# EAGLE board A111_Pulsed_Radar_Breakout-Panel (EAGLE 9.5.2), part 1 of 2
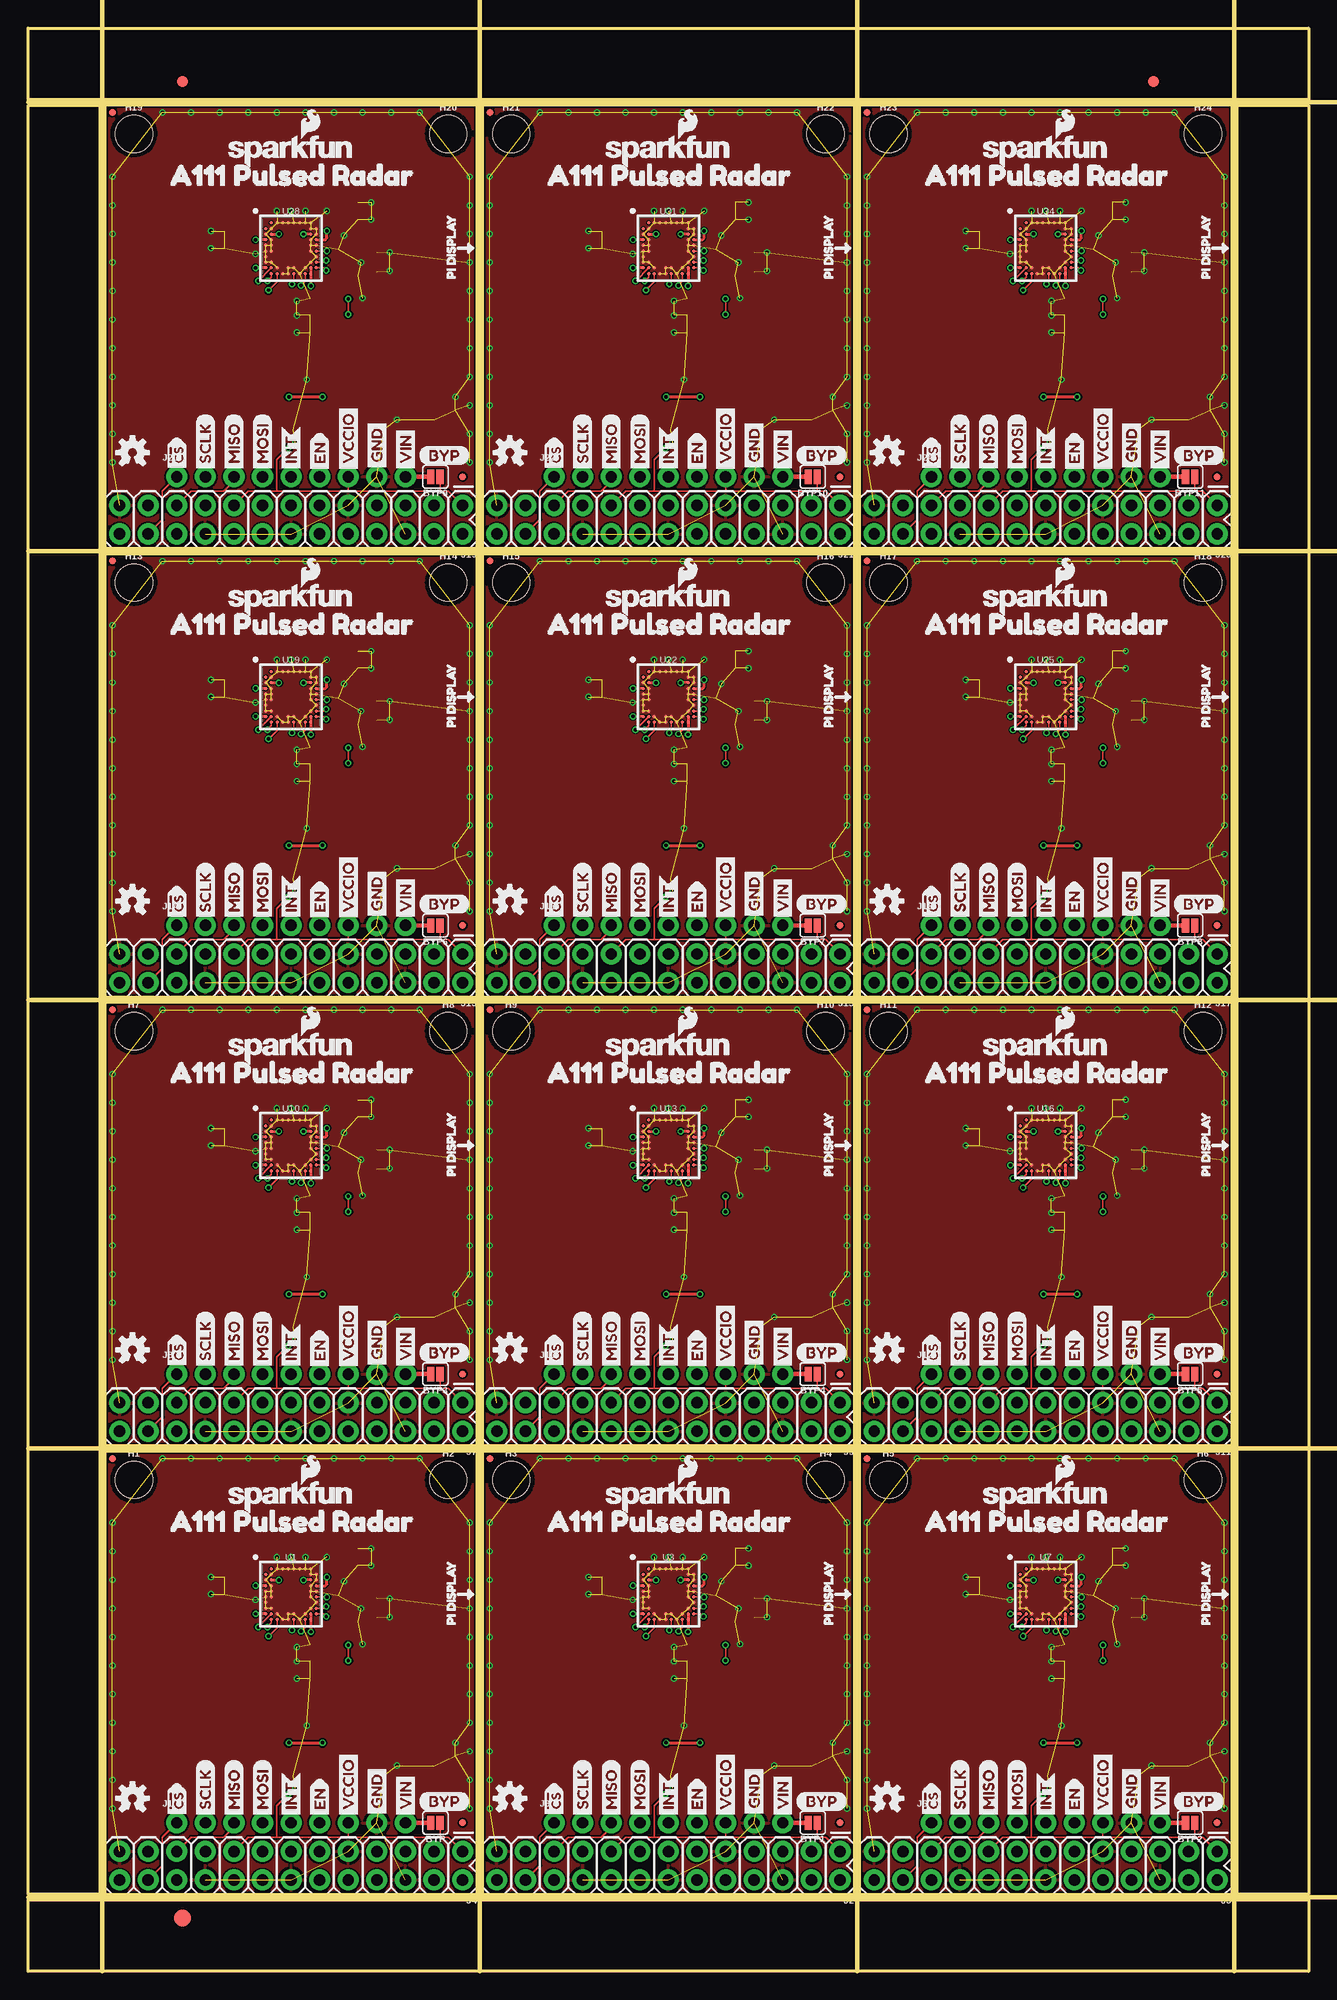
[diagram p0: board, top side]
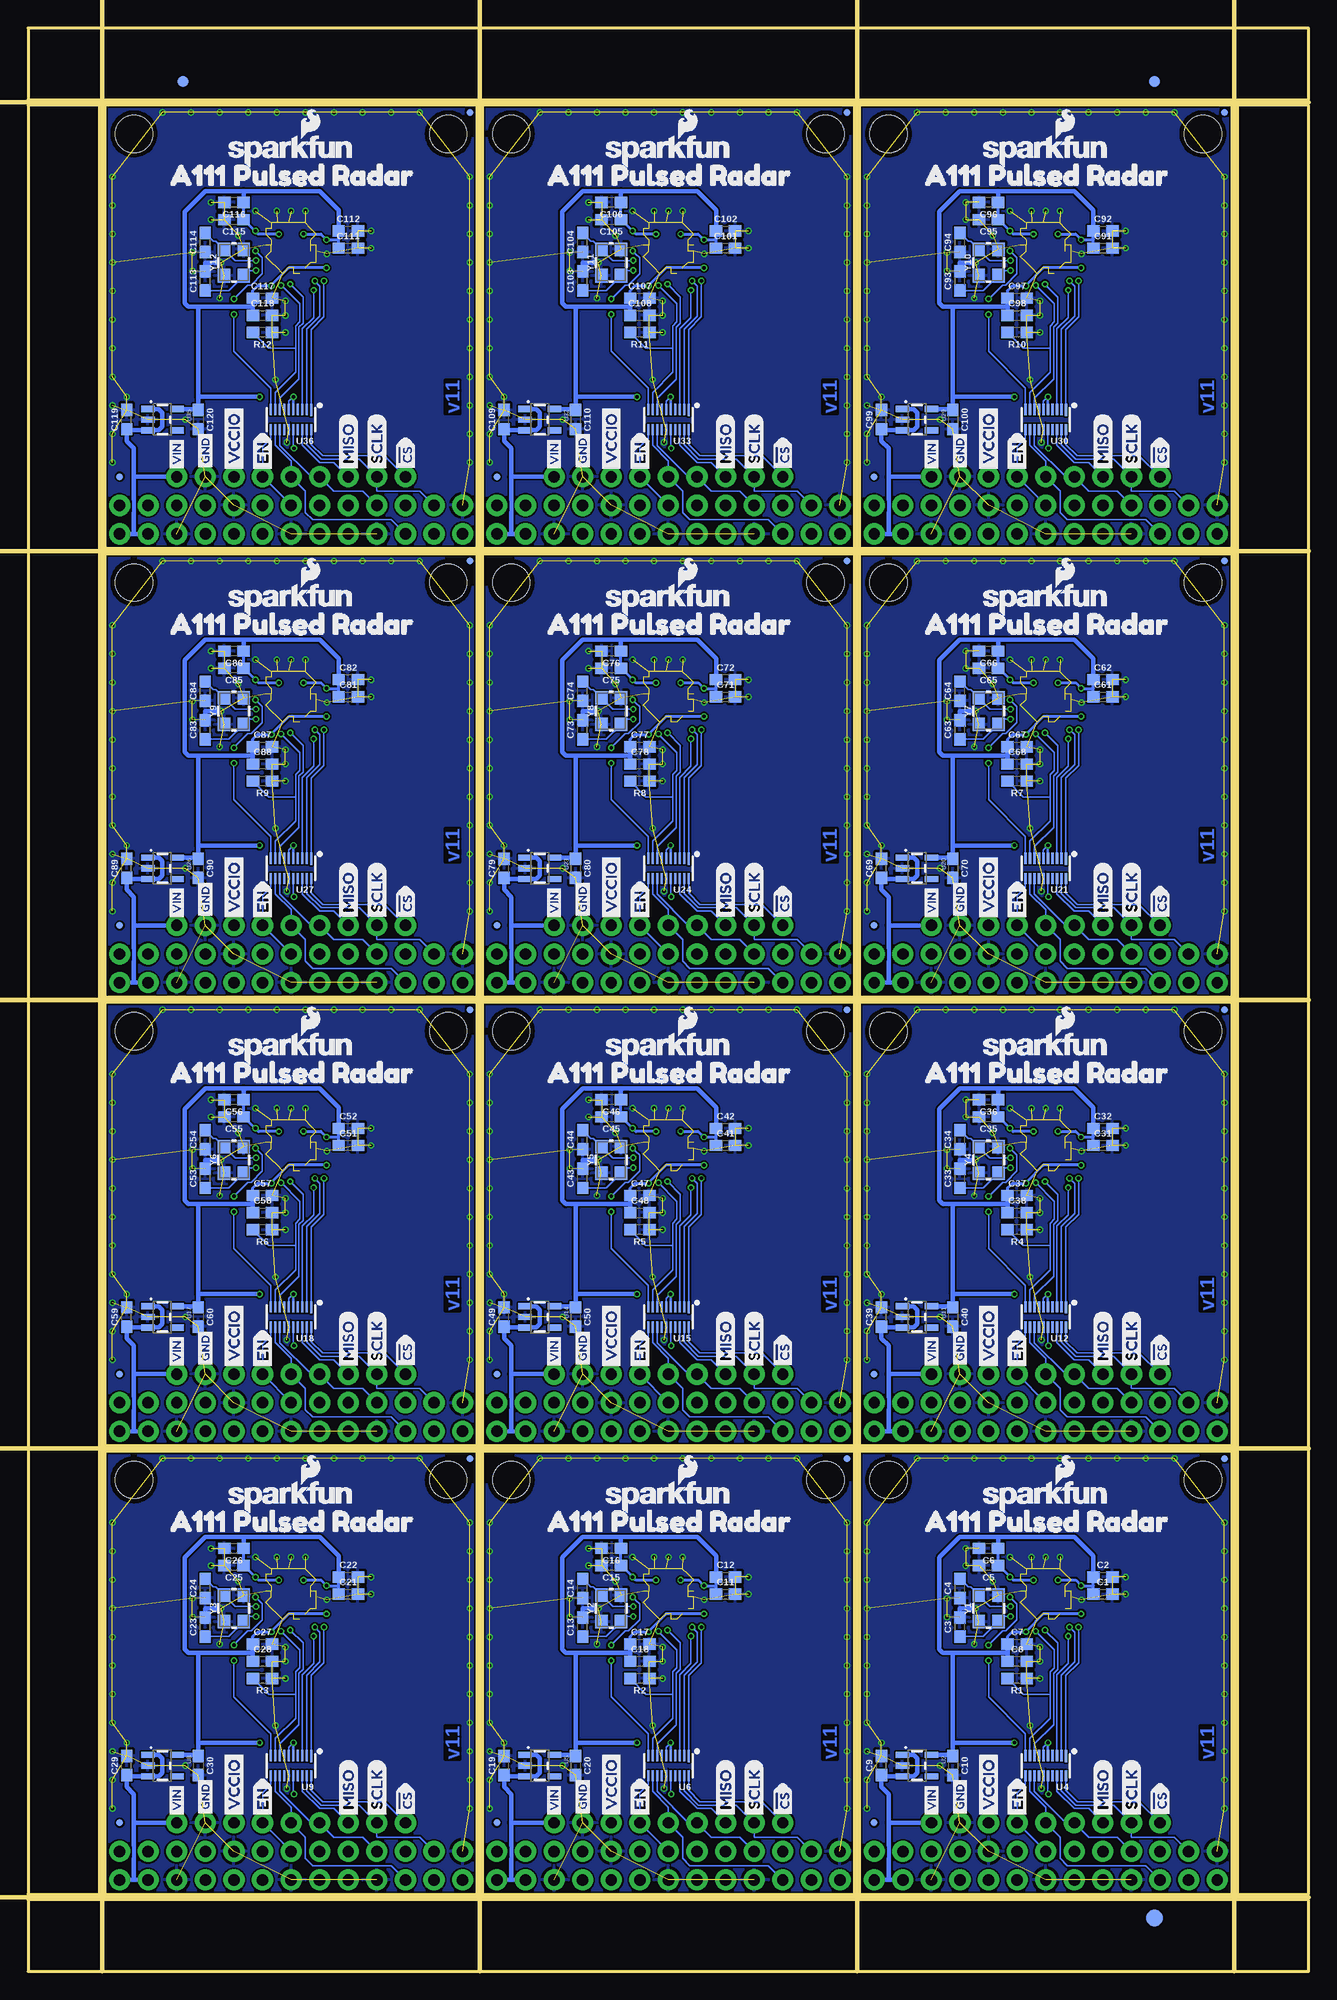
[diagram p1: board, bottom side, seen from below]

Size 113.79 x 172.72 mm. Coordinates in mm from the lower left corner, seen from the top.
Outline: 6.86,6.86 39.88,6.86 39.88,46.23 6.86,46.23 6.86,6.86
Outline: 40.39,6.86 73.41,6.86 73.41,46.23 40.39,46.23 40.39,6.86
Outline: 73.91,6.86 106.93,6.86 106.93,46.23 73.91,46.23 73.91,6.86
Outline: 6.86,46.74 39.88,46.74 39.88,86.11 6.86,86.11 6.86,46.74
Outline: 40.39,46.74 73.41,46.74 73.41,86.11 40.39,86.11 40.39,46.74
Outline: 73.91,46.74 106.93,46.74 106.93,86.11 73.91,86.11 73.91,46.74
Outline: 6.86,86.61 39.88,86.61 39.88,125.98 6.86,125.98 6.86,86.61
Outline: 40.39,86.61 73.41,86.61 73.41,125.98 40.39,125.98 40.39,86.61
Outline: 73.91,86.61 106.93,86.61 106.93,125.98 73.91,125.98 73.91,86.61
Outline: 6.86,126.49 39.88,126.49 39.88,165.86 6.86,165.86 6.86,126.49
Outline: 40.39,126.49 73.41,126.49 73.41,165.86 40.39,165.86 40.39,126.49
Outline: 73.91,126.49 106.93,126.49 106.93,165.86 73.91,165.86 73.91,126.49
Outline: 0,6.35 113.79,6.35 113.79,0 0,0 0,6.35
Outline: 107.44,165.86 113.79,165.86 113.79,6.86 107.44,6.86 107.44,165.86
Outline: 0,172.72 113.79,172.72 113.79,166.37 0,166.37 0,172.72
Outline: 0,165.86 6.35,165.86 6.35,6.86 0,6.86 0,165.86
Copper layers (1*16): Top 0.035mm / dielectric 1.5mm / Bottom 0.035mm
Design rules "A111_Pulsed_Radar_Breakout": minimum track width 4mil, minimum drill 6mil, track to track 4mil, track to pad 4mil, pad to pad 4mil, via to via 4mil, smd to smd 4mil, copper to edge 4mil, drill to drill 4mil, minimum pad ring 5mil, minimum via ring 5mil, stop-mask expansion 4mil, vias tented up to drill 25mil, thermal gap 10mil
Milling: 9 lines

## Footprints (pad centres in the part's own frame; a part is rotated, then mirrored left to right if it is on the bottom)
SMT-JUMPER_2_NO_SILK = smd 0.635 x 1.27: 1 -0.406,0; 2 0.406,0
0603 = smd 1.1 x 1: 1 -0.85,0; 2 0.85,0
FIDUCIAL-1X2 = smd 1 x 1: 1 0,0
FIDUCIAL-1.5X3 = smd 1.5 x 1.5: 1 0,0
FIDUCIAL-MICRO = smd 0.635 x 0.635: 1 0,0
STAND-OFF = hole 3.302: 0,0
1X09_NO_SILK = drill 1.016 pad 1.88: 1 0,0; 2 2.54,0; 3 5.08,0; 4 7.62,0; 5 10.16,0; 6 12.7,0; 7 15.24,0; 8 17.78,0; 9 20.32,0
2X13 = drill 1.016 pad 1.88: 1 0,0; 2 0,2.54; 3 2.54,0; 4 2.54,2.54; 5 5.08,0; 6 5.08,2.54; 7 7.62,0; 8 7.62,2.54; 9 10.16,0; 10 10.16,2.54; 11 12.7,0; 12 12.7,2.54; 13 15.24,0; 14 15.24,2.54; 15 17.78,0; 16 17.78,2.54; 17 20.32,0; 18 20.32,2.54; 19 22.86,0; 20 22.86,2.54; 21 25.4,0; 22 25.4,2.54; 23 27.94,0; 24 27.94,2.54; 25 30.48,0; 26 30.48,2.54
A111 = smd 0.3 x 0.3: A2 -1.75,2.25; A3 -1.25,2.25; A4 -0.75,2.25; A5 -0.25,2.25; A6 0.25,2.25; A7 0.75,2.25; A8 1.25,2.25; A9 1.75,2.25; B1 -2.25,1.75; B2 -1.75,1.75; B9 1.75,1.75; B10 2.25,1.75; C1 -2.25,1.25; C2 -1.75,1.25; C9 1.75,1.25; C10 2.25,1.25; D1 -2.25,0.75; D2 -1.75,0.75; D9 1.75,0.75; D10 2.25,0.75; E1 -2.25,0.25; E2 -1.75,0.25; E9 1.75,0.25; E10 2.25,0.25; F1 -2.25,-0.25; F2 -1.75,-0.25; F9 1.75,-0.25; F10 2.25,-0.25; G1 -2.25,-0.75; G10 2.25,-0.75; H1 -2.25,-1.25; H2 -1.75,-1.25; H9 1.75,-1.25; H10 2.25,-1.25; J1 -2.25,-1.75; J2 -1.75,-1.75; J3 -1.25,-1.75; J5 -0.25,-1.75; J6 0.25,-1.75; J8 1.25,-1.75; J9 1.75,-1.75; J10 2.25,-1.75; K2 -1.75,-2.25; K3 -1.25,-2.25; K4 -0.75,-2.25; K5 -0.25,-2.25; K6 0.25,-2.25; K7 0.75,-2.25; K8 1.25,-2.25; K9 1.75,-2.25
SOT23-5 = smd 0.55 x 1.2: 1 -0.95,-1.3; 2 0,-1.3; 3 0.95,-1.3; 4 0.95,1.3; 5 -0.95,1.3
UFDFN-20 = smd 0.2 x 1.1: 1 -1.8,-0.85 | smd 0.2 x 1: 2 -1.4,-0.9; 3 -1,-0.9; 4 -0.6,-0.9; 5 -0.2,-0.9; 6 0.2,-0.9; 7 0.6,-0.9; 8 1,-0.9; 9 1.4,-0.9; 10 1.8,-0.9; 11 1.8,0.9; 12 1.4,0.9; 13 1,0.9; 14 0.6,0.9; 15 0.2,0.9; 16 -0.2,0.9; 17 -0.6,0.9; 18 -1,0.9; 19 -1.4,0.9; 20 -1.8,0.9
CRYSTAL-SMD-3.2X2.5MM = smd 1.2 x 1.1: 1 -1.175,-0.875; 2 1.175,-0.875; 3 1.175,0.875; 4 -1.175,0.875

## Placement (x,y rotation side)
BYP  JUMPER-SMT_2_NO_SILK  [SMT-JUMPER_2_NO_SILK]  36.2,13.21 180 top
BYP1  JUMPER-SMT_2_NO_SILK  [SMT-JUMPER_2_NO_SILK]  69.72,13.21 180 top
BYP2  JUMPER-SMT_2_NO_SILK  [SMT-JUMPER_2_NO_SILK]  103.25,13.21 180 top
BYP3  JUMPER-SMT_2_NO_SILK  [SMT-JUMPER_2_NO_SILK]  36.2,53.09 180 top
BYP4  JUMPER-SMT_2_NO_SILK  [SMT-JUMPER_2_NO_SILK]  69.72,53.09 180 top
BYP5  JUMPER-SMT_2_NO_SILK  [SMT-JUMPER_2_NO_SILK]  103.25,53.09 180 top
BYP6  JUMPER-SMT_2_NO_SILK  [SMT-JUMPER_2_NO_SILK]  36.2,92.96 180 top
BYP7  JUMPER-SMT_2_NO_SILK  [SMT-JUMPER_2_NO_SILK]  69.72,92.96 180 top
BYP8  JUMPER-SMT_2_NO_SILK  [SMT-JUMPER_2_NO_SILK]  103.25,92.96 180 top
BYP9  JUMPER-SMT_2_NO_SILK  [SMT-JUMPER_2_NO_SILK]  36.2,132.84 180 top
BYP10  JUMPER-SMT_2_NO_SILK  [SMT-JUMPER_2_NO_SILK]  69.72,132.84 180 top
BYP11  JUMPER-SMT_2_NO_SILK  [SMT-JUMPER_2_NO_SILK]  103.25,132.84 180 top
C1  0.1uF  [0603]  18.29,33.53 0 bottom
C2  1.0uF  [0603]  18.29,35.05 0 bottom
C3  10pF  [0603]  30.99,30.61 90 bottom
C4  10pF  [0603]  30.99,34.04 90 bottom
C5  0.1uF  [0603]  28.45,36.07 180 bottom
C6  1.0uF  [0603]  28.45,37.59 180 bottom
C7  0.1uF  [0603]  25.91,29.08 0 bottom
C8  1.0uF  [0603]  25.91,27.56 0 bottom
C9  1.0uF  [0603]  37.97,18.29 90 bottom
C10  1.0uF  [0603]  31.62,18.29 270 bottom
C11  0.1uF  [0603]  51.82,33.53 0 bottom
C12  1.0uF  [0603]  51.82,35.05 0 bottom
C13  10pF  [0603]  64.52,30.61 90 bottom
C14  10pF  [0603]  64.52,34.04 90 bottom
C15  0.1uF  [0603]  61.98,36.07 180 bottom
C16  1.0uF  [0603]  61.98,37.59 180 bottom
C17  0.1uF  [0603]  59.44,29.08 0 bottom
C18  1.0uF  [0603]  59.44,27.56 0 bottom
C19  1.0uF  [0603]  71.5,18.29 90 bottom
C20  1.0uF  [0603]  65.15,18.29 270 bottom
C21  0.1uF  [0603]  85.34,33.53 0 bottom
C22  1.0uF  [0603]  85.34,35.05 0 bottom
C23  10pF  [0603]  98.04,30.61 90 bottom
C24  10pF  [0603]  98.04,34.04 90 bottom
C25  0.1uF  [0603]  95.5,36.07 180 bottom
C26  1.0uF  [0603]  95.5,37.59 180 bottom
C27  0.1uF  [0603]  92.96,29.08 0 bottom
C28  1.0uF  [0603]  92.96,27.56 0 bottom
C29  1.0uF  [0603]  105.03,18.29 90 bottom
C30  1.0uF  [0603]  98.68,18.29 270 bottom
C31  0.1uF  [0603]  18.29,73.41 0 bottom
C32  1.0uF  [0603]  18.29,74.93 0 bottom
C33  10pF  [0603]  30.99,70.48 90 bottom
C34  10pF  [0603]  30.99,73.91 90 bottom
C35  0.1uF  [0603]  28.45,75.95 180 bottom
C36  1.0uF  [0603]  28.45,77.47 180 bottom
C37  0.1uF  [0603]  25.91,68.96 0 bottom
C38  1.0uF  [0603]  25.91,67.44 0 bottom
C39  1.0uF  [0603]  37.97,58.17 90 bottom
C40  1.0uF  [0603]  31.62,58.17 270 bottom
C41  0.1uF  [0603]  51.82,73.41 0 bottom
C42  1.0uF  [0603]  51.82,74.93 0 bottom
C43  10pF  [0603]  64.52,70.48 90 bottom
C44  10pF  [0603]  64.52,73.91 90 bottom
C45  0.1uF  [0603]  61.98,75.95 180 bottom
C46  1.0uF  [0603]  61.98,77.47 180 bottom
C47  0.1uF  [0603]  59.44,68.96 0 bottom
C48  1.0uF  [0603]  59.44,67.44 0 bottom
C49  1.0uF  [0603]  71.5,58.17 90 bottom
C50  1.0uF  [0603]  65.15,58.17 270 bottom
C51  0.1uF  [0603]  85.34,73.41 0 bottom
C52  1.0uF  [0603]  85.34,74.93 0 bottom
C53  10pF  [0603]  98.04,70.48 90 bottom
C54  10pF  [0603]  98.04,73.91 90 bottom
C55  0.1uF  [0603]  95.5,75.95 180 bottom
C56  1.0uF  [0603]  95.5,77.47 180 bottom
C57  0.1uF  [0603]  92.96,68.96 0 bottom
C58  1.0uF  [0603]  92.96,67.44 0 bottom
C59  1.0uF  [0603]  105.03,58.17 90 bottom
C60  1.0uF  [0603]  98.68,58.17 270 bottom
C61  0.1uF  [0603]  18.29,113.28 0 bottom
C62  1.0uF  [0603]  18.29,114.81 0 bottom
C63  10pF  [0603]  30.99,110.36 90 bottom
C64  10pF  [0603]  30.99,113.79 90 bottom
C65  0.1uF  [0603]  28.45,115.82 180 bottom
C66  1.0uF  [0603]  28.45,117.35 180 bottom
C67  0.1uF  [0603]  25.91,108.84 0 bottom
C68  1.0uF  [0603]  25.91,107.31 0 bottom
C69  1.0uF  [0603]  37.97,98.04 90 bottom
C70  1.0uF  [0603]  31.62,98.04 270 bottom
C71  0.1uF  [0603]  51.82,113.28 0 bottom
C72  1.0uF  [0603]  51.82,114.81 0 bottom
C73  10pF  [0603]  64.52,110.36 90 bottom
C74  10pF  [0603]  64.52,113.79 90 bottom
C75  0.1uF  [0603]  61.98,115.82 180 bottom
C76  1.0uF  [0603]  61.98,117.35 180 bottom
C77  0.1uF  [0603]  59.44,108.84 0 bottom
C78  1.0uF  [0603]  59.44,107.31 0 bottom
C79  1.0uF  [0603]  71.5,98.04 90 bottom
C80  1.0uF  [0603]  65.15,98.04 270 bottom
C81  0.1uF  [0603]  85.34,113.28 0 bottom
C82  1.0uF  [0603]  85.34,114.81 0 bottom
C83  10pF  [0603]  98.04,110.36 90 bottom
C84  10pF  [0603]  98.04,113.79 90 bottom
C85  0.1uF  [0603]  95.5,115.82 180 bottom
C86  1.0uF  [0603]  95.5,117.35 180 bottom
C87  0.1uF  [0603]  92.96,108.84 0 bottom
C88  1.0uF  [0603]  92.96,107.31 0 bottom
C89  1.0uF  [0603]  105.03,98.04 90 bottom
C90  1.0uF  [0603]  98.68,98.04 270 bottom
C91  0.1uF  [0603]  18.29,153.16 0 bottom
C92  1.0uF  [0603]  18.29,154.69 0 bottom
C93  10pF  [0603]  30.99,150.24 90 bottom
C94  10pF  [0603]  30.99,153.67 90 bottom
C95  0.1uF  [0603]  28.45,155.7 180 bottom
C96  1.0uF  [0603]  28.45,157.23 180 bottom
C97  0.1uF  [0603]  25.91,148.72 0 bottom
C98  1.0uF  [0603]  25.91,147.19 0 bottom
C99  1.0uF  [0603]  37.97,137.92 90 bottom
C100  1.0uF  [0603]  31.62,137.92 270 bottom
C101  0.1uF  [0603]  51.82,153.16 0 bottom
C102  1.0uF  [0603]  51.82,154.69 0 bottom
C103  10pF  [0603]  64.52,150.24 90 bottom
C104  10pF  [0603]  64.52,153.67 90 bottom
C105  0.1uF  [0603]  61.98,155.7 180 bottom
C106  1.0uF  [0603]  61.98,157.23 180 bottom
C107  0.1uF  [0603]  59.44,148.72 0 bottom
C108  1.0uF  [0603]  59.44,147.19 0 bottom
C109  1.0uF  [0603]  71.5,137.92 90 bottom
C110  1.0uF  [0603]  65.15,137.92 270 bottom
C111  0.1uF  [0603]  85.34,153.16 0 bottom
C112  1.0uF  [0603]  85.34,154.69 0 bottom
C113  10pF  [0603]  98.04,150.24 90 bottom
C114  10pF  [0603]  98.04,153.67 90 bottom
C115  0.1uF  [0603]  95.5,155.7 180 bottom
C116  1.0uF  [0603]  95.5,157.23 180 bottom
C117  0.1uF  [0603]  92.96,148.72 0 bottom
C118  1.0uF  [0603]  92.96,147.19 0 bottom
C119  1.0uF  [0603]  105.03,137.92 90 bottom
C120  1.0uF  [0603]  98.68,137.92 270 bottom
E$1  [FIDUCIAL-1X2]  13.72,167.96 0 top
E$2  [FIDUCIAL-1X2]  13.72,167.96 0 bottom
E$3  [FIDUCIAL-1X2]  100.01,167.96 0 top
E$4  [FIDUCIAL-1X2]  100.01,167.96 0 bottom
E$5  [FIDUCIAL-1.5X3]  13.72,4.76 0 top
E$6  [FIDUCIAL-1.5X3]  13.72,4.76 0 bottom
FD1  FIDUCIALUFIDUCIAL  [FIDUCIAL-MICRO]  38.61,13.21 0 top
FD2  FIDUCIALUFIDUCIAL  [FIDUCIAL-MICRO]  7.49,45.59 0 top
FD3  FIDUCIALUFIDUCIAL  [FIDUCIAL-MICRO]  7.49,45.59 0 bottom
FD4  FIDUCIALUFIDUCIAL  [FIDUCIAL-MICRO]  38.61,13.21 0 bottom
FD5  FIDUCIALUFIDUCIAL  [FIDUCIAL-MICRO]  72.14,13.21 0 top
FD6  FIDUCIALUFIDUCIAL  [FIDUCIAL-MICRO]  41.02,45.59 0 top
FD7  FIDUCIALUFIDUCIAL  [FIDUCIAL-MICRO]  41.02,45.59 0 bottom
FD8  FIDUCIALUFIDUCIAL  [FIDUCIAL-MICRO]  72.14,13.21 0 bottom
FD9  FIDUCIALUFIDUCIAL  [FIDUCIAL-MICRO]  105.66,13.21 0 top
FD10  FIDUCIALUFIDUCIAL  [FIDUCIAL-MICRO]  74.55,45.59 0 top
FD11  FIDUCIALUFIDUCIAL  [FIDUCIAL-MICRO]  74.55,45.59 0 bottom
FD12  FIDUCIALUFIDUCIAL  [FIDUCIAL-MICRO]  105.66,13.21 0 bottom
FD13  FIDUCIALUFIDUCIAL  [FIDUCIAL-MICRO]  38.61,53.09 0 top
FD14  FIDUCIALUFIDUCIAL  [FIDUCIAL-MICRO]  7.49,85.47 0 top
FD15  FIDUCIALUFIDUCIAL  [FIDUCIAL-MICRO]  7.49,85.47 0 bottom
FD16  FIDUCIALUFIDUCIAL  [FIDUCIAL-MICRO]  38.61,53.09 0 bottom
FD17  FIDUCIALUFIDUCIAL  [FIDUCIAL-MICRO]  72.14,53.09 0 top
FD18  FIDUCIALUFIDUCIAL  [FIDUCIAL-MICRO]  41.02,85.47 0 top
FD19  FIDUCIALUFIDUCIAL  [FIDUCIAL-MICRO]  41.02,85.47 0 bottom
FD20  FIDUCIALUFIDUCIAL  [FIDUCIAL-MICRO]  72.14,53.09 0 bottom
FD21  FIDUCIALUFIDUCIAL  [FIDUCIAL-MICRO]  105.66,53.09 0 top
FD22  FIDUCIALUFIDUCIAL  [FIDUCIAL-MICRO]  74.55,85.47 0 top
FD23  FIDUCIALUFIDUCIAL  [FIDUCIAL-MICRO]  74.55,85.47 0 bottom
FD24  FIDUCIALUFIDUCIAL  [FIDUCIAL-MICRO]  105.66,53.09 0 bottom
FD25  FIDUCIALUFIDUCIAL  [FIDUCIAL-MICRO]  38.61,92.96 0 top
FD26  FIDUCIALUFIDUCIAL  [FIDUCIAL-MICRO]  7.49,125.35 0 top
FD27  FIDUCIALUFIDUCIAL  [FIDUCIAL-MICRO]  7.49,125.35 0 bottom
FD28  FIDUCIALUFIDUCIAL  [FIDUCIAL-MICRO]  38.61,92.96 0 bottom
FD29  FIDUCIALUFIDUCIAL  [FIDUCIAL-MICRO]  72.14,92.96 0 top
FD30  FIDUCIALUFIDUCIAL  [FIDUCIAL-MICRO]  41.02,125.35 0 top
FD31  FIDUCIALUFIDUCIAL  [FIDUCIAL-MICRO]  41.02,125.35 0 bottom
FD32  FIDUCIALUFIDUCIAL  [FIDUCIAL-MICRO]  72.14,92.96 0 bottom
FD33  FIDUCIALUFIDUCIAL  [FIDUCIAL-MICRO]  105.66,92.96 0 top
FD34  FIDUCIALUFIDUCIAL  [FIDUCIAL-MICRO]  74.55,125.35 0 top
FD35  FIDUCIALUFIDUCIAL  [FIDUCIAL-MICRO]  74.55,125.35 0 bottom
FD36  FIDUCIALUFIDUCIAL  [FIDUCIAL-MICRO]  105.66,92.96 0 bottom
FD37  FIDUCIALUFIDUCIAL  [FIDUCIAL-MICRO]  38.61,132.84 0 top
FD38  FIDUCIALUFIDUCIAL  [FIDUCIAL-MICRO]  7.49,165.23 0 top
FD39  FIDUCIALUFIDUCIAL  [FIDUCIAL-MICRO]  7.49,165.23 0 bottom
FD40  FIDUCIALUFIDUCIAL  [FIDUCIAL-MICRO]  38.61,132.84 0 bottom
FD41  FIDUCIALUFIDUCIAL  [FIDUCIAL-MICRO]  72.14,132.84 0 top
FD42  FIDUCIALUFIDUCIAL  [FIDUCIAL-MICRO]  41.02,165.23 0 top
FD43  FIDUCIALUFIDUCIAL  [FIDUCIAL-MICRO]  41.02,165.23 0 bottom
FD44  FIDUCIALUFIDUCIAL  [FIDUCIAL-MICRO]  72.14,132.84 0 bottom
FD45  FIDUCIALUFIDUCIAL  [FIDUCIAL-MICRO]  105.66,132.84 0 top
FD46  FIDUCIALUFIDUCIAL  [FIDUCIAL-MICRO]  74.55,165.23 0 top
FD47  FIDUCIALUFIDUCIAL  [FIDUCIAL-MICRO]  74.55,165.23 0 bottom
FD48  FIDUCIALUFIDUCIAL  [FIDUCIAL-MICRO]  105.66,132.84 0 bottom
H1  STAND-OFF  [STAND-OFF]  9.4,43.69 0 top
H2  STAND-OFF  [STAND-OFF]  37.34,43.69 0 top
H3  STAND-OFF  [STAND-OFF]  42.93,43.69 0 top
H4  STAND-OFF  [STAND-OFF]  70.87,43.69 0 top
H5  STAND-OFF  [STAND-OFF]  76.45,43.69 0 top
H6  STAND-OFF  [STAND-OFF]  104.39,43.69 0 top
H7  STAND-OFF  [STAND-OFF]  9.4,83.57 0 top
H8  STAND-OFF  [STAND-OFF]  37.34,83.57 0 top
H9  STAND-OFF  [STAND-OFF]  42.93,83.57 0 top
H10  STAND-OFF  [STAND-OFF]  70.87,83.57 0 top
H11  STAND-OFF  [STAND-OFF]  76.45,83.57 0 top
H12  STAND-OFF  [STAND-OFF]  104.39,83.57 0 top
H13  STAND-OFF  [STAND-OFF]  9.4,123.44 0 top
H14  STAND-OFF  [STAND-OFF]  37.34,123.44 0 top
H15  STAND-OFF  [STAND-OFF]  42.93,123.44 0 top
H16  STAND-OFF  [STAND-OFF]  70.87,123.44 0 top
H17  STAND-OFF  [STAND-OFF]  76.45,123.44 0 top
H18  STAND-OFF  [STAND-OFF]  104.39,123.44 0 top
H19  STAND-OFF  [STAND-OFF]  9.4,163.32 0 top
H20  STAND-OFF  [STAND-OFF]  37.34,163.32 0 top
H21  STAND-OFF  [STAND-OFF]  42.93,163.32 0 top
H22  STAND-OFF  [STAND-OFF]  70.87,163.32 0 top
H23  STAND-OFF  [STAND-OFF]  76.45,163.32 0 top
H24  STAND-OFF  [STAND-OFF]  104.39,163.32 0 top
J1  [1X09_NO_SILK]  13.21,13.21 0 top
J2  RASPBERRYPI-26-PIN-GPIO  [2X13]  72.14,10.67 180 top
J3  [1X09_NO_SILK]  46.74,13.21 0 top
J4  RASPBERRYPI-26-PIN-GPIO  [2X13]  38.61,10.67 180 top
J5  RASPBERRYPI-26-PIN-GPIO  [2X13]  105.66,10.67 180 top
J6  [1X09_NO_SILK]  80.26,13.21 0 top
J7  RASPBERRYPI-26-PIN-GPIO  [2X13]  38.61,50.55 180 top
J8  [1X09_NO_SILK]  13.21,53.09 0 top
J9  RASPBERRYPI-26-PIN-GPIO  [2X13]  72.14,50.55 180 top
J10  [1X09_NO_SILK]  46.74,53.09 0 top
J11  RASPBERRYPI-26-PIN-GPIO  [2X13]  105.66,50.55 180 top
J12  [1X09_NO_SILK]  80.26,53.09 0 top
J13  RASPBERRYPI-26-PIN-GPIO  [2X13]  38.61,90.42 180 top
J14  [1X09_NO_SILK]  13.21,92.96 0 top
J15  RASPBERRYPI-26-PIN-GPIO  [2X13]  72.14,90.42 180 top
J16  [1X09_NO_SILK]  46.74,92.96 0 top
J17  RASPBERRYPI-26-PIN-GPIO  [2X13]  105.66,90.42 180 top
J18  [1X09_NO_SILK]  80.26,92.96 0 top
J19  RASPBERRYPI-26-PIN-GPIO  [2X13]  38.61,130.3 180 top
J20  [1X09_NO_SILK]  13.21,132.84 0 top
J21  RASPBERRYPI-26-PIN-GPIO  [2X13]  72.14,130.3 180 top
J22  [1X09_NO_SILK]  46.74,132.84 0 top
J23  RASPBERRYPI-26-PIN-GPIO  [2X13]  105.66,130.3 180 top
J24  [1X09_NO_SILK]  80.26,132.84 0 top
LOGO1  SFE_LOGO_NAME_FLAME.1_INCH  [SFE_LOGO_NAME_FLAME_.1]  23.37,42.16 0 top
LOGO2  OSHW-LOGOS  [OSHW-LOGO-S]  9.27,15.37 0 top
LOGO3  SFE_LOGO_NAME_FLAME.1_INCH  [SFE_LOGO_NAME_FLAME_.1]  23.37,42.16 0 bottom
LOGO4  OSHW-LOGOS  [OSHW-LOGO-S]  42.8,15.37 0 top
LOGO5  SFE_LOGO_NAME_FLAME.1_INCH  [SFE_LOGO_NAME_FLAME_.1]  56.9,42.16 0 top
LOGO6  SFE_LOGO_NAME_FLAME.1_INCH  [SFE_LOGO_NAME_FLAME_.1]  56.9,42.16 0 bottom
LOGO7  OSHW-LOGOS  [OSHW-LOGO-S]  76.33,15.37 0 top
LOGO8  SFE_LOGO_NAME_FLAME.1_INCH  [SFE_LOGO_NAME_FLAME_.1]  90.42,42.16 0 top
LOGO9  SFE_LOGO_NAME_FLAME.1_INCH  [SFE_LOGO_NAME_FLAME_.1]  90.42,42.16 0 bottom
LOGO10  OSHW-LOGOS  [OSHW-LOGO-S]  9.27,55.24 0 top
LOGO11  SFE_LOGO_NAME_FLAME.1_INCH  [SFE_LOGO_NAME_FLAME_.1]  23.37,82.04 0 top
LOGO12  SFE_LOGO_NAME_FLAME.1_INCH  [SFE_LOGO_NAME_FLAME_.1]  23.37,82.04 0 bottom
LOGO13  OSHW-LOGOS  [OSHW-LOGO-S]  42.8,55.24 0 top
LOGO14  SFE_LOGO_NAME_FLAME.1_INCH  [SFE_LOGO_NAME_FLAME_.1]  56.9,82.04 0 top
LOGO15  SFE_LOGO_NAME_FLAME.1_INCH  [SFE_LOGO_NAME_FLAME_.1]  56.9,82.04 0 bottom
LOGO16  OSHW-LOGOS  [OSHW-LOGO-S]  76.33,55.24 0 top
LOGO17  SFE_LOGO_NAME_FLAME.1_INCH  [SFE_LOGO_NAME_FLAME_.1]  90.42,82.04 0 top
LOGO18  SFE_LOGO_NAME_FLAME.1_INCH  [SFE_LOGO_NAME_FLAME_.1]  90.42,82.04 0 bottom
LOGO19  OSHW-LOGOS  [OSHW-LOGO-S]  9.27,95.12 0 top
LOGO20  SFE_LOGO_NAME_FLAME.1_INCH  [SFE_LOGO_NAME_FLAME_.1]  23.37,121.92 0 top
LOGO21  SFE_LOGO_NAME_FLAME.1_INCH  [SFE_LOGO_NAME_FLAME_.1]  23.37,121.92 0 bottom
LOGO22  OSHW-LOGOS  [OSHW-LOGO-S]  42.8,95.12 0 top
LOGO23  SFE_LOGO_NAME_FLAME.1_INCH  [SFE_LOGO_NAME_FLAME_.1]  56.9,121.92 0 top
LOGO24  SFE_LOGO_NAME_FLAME.1_INCH  [SFE_LOGO_NAME_FLAME_.1]  56.9,121.92 0 bottom
LOGO25  OSHW-LOGOS  [OSHW-LOGO-S]  76.33,95.12 0 top
LOGO26  SFE_LOGO_NAME_FLAME.1_INCH  [SFE_LOGO_NAME_FLAME_.1]  90.42,121.92 0 top
LOGO27  SFE_LOGO_NAME_FLAME.1_INCH  [SFE_LOGO_NAME_FLAME_.1]  90.42,121.92 0 bottom
LOGO28  OSHW-LOGOS  [OSHW-LOGO-S]  9.27,135 0 top
LOGO29  SFE_LOGO_NAME_FLAME.1_INCH  [SFE_LOGO_NAME_FLAME_.1]  23.37,161.8 0 top
LOGO30  SFE_LOGO_NAME_FLAME.1_INCH  [SFE_LOGO_NAME_FLAME_.1]  23.37,161.8 0 bottom
LOGO31  OSHW-LOGOS  [OSHW-LOGO-S]  42.8,135 0 top
LOGO32  SFE_LOGO_NAME_FLAME.1_INCH  [SFE_LOGO_NAME_FLAME_.1]  56.9,161.8 0 top
LOGO33  SFE_LOGO_NAME_FLAME.1_INCH  [SFE_LOGO_NAME_FLAME_.1]  56.9,161.8 0 bottom
LOGO34  OSHW-LOGOS  [OSHW-LOGO-S]  76.33,135 0 top
LOGO35  SFE_LOGO_NAME_FLAME.1_INCH  [SFE_LOGO_NAME_FLAME_.1]  90.42,161.8 0 top
LOGO36  SFE_LOGO_NAME_FLAME.1_INCH  [SFE_LOGO_NAME_FLAME_.1]  90.42,161.8 0 bottom
R1  100k  [0603]  25.91,26.04 180 bottom
R2  100k  [0603]  59.44,26.04 180 bottom
R3  100k  [0603]  92.96,26.04 180 bottom
R4  100k  [0603]  25.91,65.91 180 bottom
R5  100k  [0603]  59.44,65.91 180 bottom
R6  100k  [0603]  92.96,65.91 180 bottom
R7  100k  [0603]  25.91,105.79 180 bottom
R8  100k  [0603]  59.44,105.79 180 bottom
R9  100k  [0603]  92.96,105.79 180 bottom
R10  100k  [0603]  25.91,145.67 180 bottom
R11  100k  [0603]  59.44,145.67 180 bottom
R12  100k  [0603]  92.96,145.67 180 bottom
U1  A111  [A111]  23.37,33.53 0 top
U2  AP2127K-1.8V  [SOT23-5]  34.8,18.29 270 bottom
U3  A111  [A111]  56.9,33.53 0 top
U4  TXB0108DQSR  [UFDFN-20]  23.37,18.29 180 bottom
U5  AP2127K-1.8V  [SOT23-5]  68.33,18.29 270 bottom
U6  TXB0108DQSR  [UFDFN-20]  56.9,18.29 180 bottom
U7  A111  [A111]  90.42,33.53 0 top
U8  AP2127K-1.8V  [SOT23-5]  101.85,18.29 270 bottom
U9  TXB0108DQSR  [UFDFN-20]  90.42,18.29 180 bottom
U10  A111  [A111]  23.37,73.41 0 top
U11  AP2127K-1.8V  [SOT23-5]  34.8,58.17 270 bottom
U12  TXB0108DQSR  [UFDFN-20]  23.37,58.17 180 bottom
U13  A111  [A111]  56.9,73.41 0 top
U14  AP2127K-1.8V  [SOT23-5]  68.33,58.17 270 bottom
U15  TXB0108DQSR  [UFDFN-20]  56.9,58.17 180 bottom
U16  A111  [A111]  90.42,73.41 0 top
U17  AP2127K-1.8V  [SOT23-5]  101.85,58.17 270 bottom
U18  TXB0108DQSR  [UFDFN-20]  90.42,58.17 180 bottom
U19  A111  [A111]  23.37,113.28 0 top
U20  AP2127K-1.8V  [SOT23-5]  34.8,98.04 270 bottom
U21  TXB0108DQSR  [UFDFN-20]  23.37,98.04 180 bottom
U22  A111  [A111]  56.9,113.28 0 top
U23  AP2127K-1.8V  [SOT23-5]  68.33,98.04 270 bottom
U24  TXB0108DQSR  [UFDFN-20]  56.9,98.04 180 bottom
U25  A111  [A111]  90.42,113.28 0 top
U26  AP2127K-1.8V  [SOT23-5]  101.85,98.04 270 bottom
U27  TXB0108DQSR  [UFDFN-20]  90.42,98.04 180 bottom
U28  A111  [A111]  23.37,153.16 0 top
U29  AP2127K-1.8V  [SOT23-5]  34.8,137.92 270 bottom
U30  TXB0108DQSR  [UFDFN-20]  23.37,137.92 180 bottom
U31  A111  [A111]  56.9,153.16 0 top
U32  AP2127K-1.8V  [SOT23-5]  68.33,137.92 270 bottom
U33  TXB0108DQSR  [UFDFN-20]  56.9,137.92 180 bottom
U34  A111  [A111]  90.42,153.16 0 top
U35  AP2127K-1.8V  [SOT23-5]  101.85,137.92 270 bottom
U36  TXB0108DQSR  [UFDFN-20]  90.42,137.92 180 bottom
U$1  [A111_PULSED_RADAR9]  11.05,40 0 top
U$2  [SCLK3]  15.75,13.46 90 top
U$3  [MISO4]  18.29,13.46 90 top
U$4  [MOSI5]  20.83,13.46 90 top
U$5  [INT8]  23.37,13.46 90 top
U$6  [EN9]  25.91,13.46 90 top
U$7  [GND0]  30.99,13.59 90 top
U$8  [BYP]  34.67,15.11 0 top
U$9  [A111_PULSED_RADAR9]  35.69,40 0 bottom
U$10  [SCLK3]  15.75,13.46 90 bottom
U$11  [MISO4]  18.29,13.46 90 bottom
U$12  [PI_DISPLAY9]  37.59,30.1 90 top
U$13  [#CS9]  13.21,13.34 90 bottom
U$14  [SCLK3]  49.28,13.46 90 top
U$15  [MISO4]  51.82,13.46 90 top
U$16  [VIN0]  33.53,13.46 90 top
U$17  [#CS9]  13.21,13.34 90 top
U$18  [EN9]  25.91,13.46 90 bottom
U$19  [VCCIO1]  28.45,13.46 90 bottom
U$20  [VCCIO1]  28.45,13.46 90 top
U$21  [GND6]  30.99,13.59 90 bottom
U$22  [VIN5]  33.53,13.59 90 bottom
U$23  [MOSI5]  54.36,13.46 90 top
U$24  [INT8]  56.9,13.46 90 top
U$25  [GND0]  64.52,13.59 90 top
U$26  [SCLK3]  49.28,13.46 90 bottom
U$27  [MISO4]  51.82,13.46 90 bottom
U$28  [#CS9]  46.74,13.34 90 top
U$29  [A111_PULSED_RADAR9]  44.58,40 0 top
U$30  [A111_PULSED_RADAR9]  69.22,40 0 bottom
U$31  [PI_DISPLAY9]  71.12,30.1 90 top
U$32  [#CS9]  46.74,13.34 90 bottom
U$33  [EN9]  59.44,13.46 90 bottom
U$34  [EN9]  59.44,13.46 90 top
U$35  [BYP]  68.2,15.11 0 top
U$36  [VIN0]  67.06,13.46 90 top
U$37  [VCCIO1]  61.98,13.46 90 bottom
U$38  [VCCIO1]  61.98,13.46 90 top
U$39  [VIN5]  67.06,13.59 90 bottom
U$40  [GND6]  64.52,13.59 90 bottom
U$41  [SCLK3]  82.8,13.46 90 top
U$42  [MISO4]  85.34,13.46 90 top
U$43  [MOSI5]  87.88,13.46 90 top
U$44  [INT8]  90.42,13.46 90 top
U$45  [GND0]  98.04,13.59 90 top
U$46  [SCLK3]  82.8,13.46 90 bottom
U$47  [MISO4]  85.34,13.46 90 bottom
U$48  [#CS9]  80.26,13.34 90 top
U$49  [A111_PULSED_RADAR9]  78.11,40 0 top
U$50  [A111_PULSED_RADAR9]  102.74,40 0 bottom
U$51  [PI_DISPLAY9]  104.65,30.1 90 top
U$52  [#CS9]  80.26,13.34 90 bottom
U$53  [EN9]  92.96,13.46 90 bottom
U$54  [EN9]  92.96,13.46 90 top
U$55  [BYP]  101.73,15.11 0 top
U$56  [VIN0]  100.58,13.46 90 top
U$57  [VCCIO1]  95.5,13.46 90 bottom
U$58  [VCCIO1]  95.5,13.46 90 top
U$59  [VIN5]  100.58,13.59 90 bottom
U$60  [GND6]  98.04,13.59 90 bottom
U$61  [SCLK3]  15.75,53.34 90 top
U$62  [MISO4]  18.29,53.34 90 top
U$63  [MOSI5]  20.83,53.34 90 top
U$64  [INT8]  23.37,53.34 90 top
U$65  [GND0]  30.99,53.47 90 top
U$66  [SCLK3]  15.75,53.34 90 bottom
U$67  [MISO4]  18.29,53.34 90 bottom
U$68  [#CS9]  13.21,53.21 90 top
U$69  [A111_PULSED_RADAR9]  11.05,79.88 0 top
U$70  [A111_PULSED_RADAR9]  35.69,79.88 0 bottom
U$71  [PI_DISPLAY9]  37.59,69.98 90 top
U$72  [#CS9]  13.21,53.21 90 bottom
U$73  [EN9]  25.91,53.34 90 bottom
U$74  [EN9]  25.91,53.34 90 top
U$75  [BYP]  34.67,54.99 0 top
U$76  [VIN0]  33.53,53.34 90 top
U$77  [VCCIO1]  28.45,53.34 90 bottom
U$78  [VCCIO1]  28.45,53.34 90 top
U$79  [VIN5]  33.53,53.47 90 bottom
U$80  [GND6]  30.99,53.47 90 bottom
U$81  [SCLK3]  49.28,53.34 90 top
U$82  [MISO4]  51.82,53.34 90 top
U$83  [MOSI5]  54.36,53.34 90 top
U$84  [INT8]  56.9,53.34 90 top
U$85  [GND0]  64.52,53.47 90 top
U$86  [SCLK3]  49.28,53.34 90 bottom
U$87  [MISO4]  51.82,53.34 90 bottom
U$88  [#CS9]  46.74,53.21 90 top
U$89  [A111_PULSED_RADAR9]  44.58,79.88 0 top
U$90  [A111_PULSED_RADAR9]  69.22,79.88 0 bottom
U$91  [PI_DISPLAY9]  71.12,69.98 90 top
U$92  [#CS9]  46.74,53.21 90 bottom
U$93  [EN9]  59.44,53.34 90 bottom
U$94  [EN9]  59.44,53.34 90 top
U$95  [BYP]  68.2,54.99 0 top
U$96  [VIN0]  67.06,53.34 90 top
U$97  [VCCIO1]  61.98,53.34 90 bottom
U$98  [VCCIO1]  61.98,53.34 90 top
U$99  [VIN5]  67.06,53.47 90 bottom
U$100  [GND6]  64.52,53.47 90 bottom
U$101  [SCLK3]  82.8,53.34 90 top
U$102  [MISO4]  85.34,53.34 90 top
U$103  [MOSI5]  87.88,53.34 90 top
U$104  [INT8]  90.42,53.34 90 top
U$105  [GND0]  98.04,53.47 90 top
U$106  [SCLK3]  82.8,53.34 90 bottom
U$107  [MISO4]  85.34,53.34 90 bottom
U$108  [#CS9]  80.26,53.21 90 top
U$109  [A111_PULSED_RADAR9]  78.11,79.88 0 top
U$110  [A111_PULSED_RADAR9]  102.74,79.88 0 bottom
U$111  [PI_DISPLAY9]  104.65,69.98 90 top
U$112  [#CS9]  80.26,53.21 90 bottom
U$113  [EN9]  92.96,53.34 90 bottom
U$114  [EN9]  92.96,53.34 90 top
U$115  [BYP]  101.73,54.99 0 top
U$116  [VIN0]  100.58,53.34 90 top
U$117  [VCCIO1]  95.5,53.34 90 bottom
U$118  [VCCIO1]  95.5,53.34 90 top
U$119  [VIN5]  100.58,53.47 90 bottom
U$120  [GND6]  98.04,53.47 90 bottom
U$121  [SCLK3]  15.75,93.22 90 top
U$122  [MISO4]  18.29,93.22 90 top
U$123  [MOSI5]  20.83,93.22 90 top
U$124  [INT8]  23.37,93.22 90 top
U$125  [GND0]  30.99,93.34 90 top
U$126  [SCLK3]  15.75,93.22 90 bottom
U$127  [MISO4]  18.29,93.22 90 bottom
U$128  [#CS9]  13.21,93.09 90 top
U$129  [A111_PULSED_RADAR9]  11.05,119.76 0 top
U$130  [A111_PULSED_RADAR9]  35.69,119.76 0 bottom
U$131  [PI_DISPLAY9]  37.59,109.86 90 top
U$132  [#CS9]  13.21,93.09 90 bottom
U$133  [EN9]  25.91,93.22 90 bottom
U$134  [EN9]  25.91,93.22 90 top
U$135  [BYP]  34.67,94.87 0 top
U$136  [VIN0]  33.53,93.22 90 top
U$137  [VCCIO1]  28.45,93.22 90 bottom
U$138  [VCCIO1]  28.45,93.22 90 top
U$139  [VIN5]  33.53,93.34 90 bottom
U$140  [GND6]  30.99,93.34 90 bottom
U$141  [SCLK3]  49.28,93.22 90 top
U$142  [MISO4]  51.82,93.22 90 top
U$143  [MOSI5]  54.36,93.22 90 top
U$144  [INT8]  56.9,93.22 90 top
U$145  [GND0]  64.52,93.34 90 top
U$146  [SCLK3]  49.28,93.22 90 bottom
U$147  [MISO4]  51.82,93.22 90 bottom
U$148  [#CS9]  46.74,93.09 90 top
U$149  [A111_PULSED_RADAR9]  44.58,119.76 0 top
U$150  [A111_PULSED_RADAR9]  69.22,119.76 0 bottom
U$151  [PI_DISPLAY9]  71.12,109.86 90 top
U$152  [#CS9]  46.74,93.09 90 bottom
U$153  [EN9]  59.44,93.22 90 bottom
U$154  [EN9]  59.44,93.22 90 top
U$155  [BYP]  68.2,94.87 0 top
U$156  [VIN0]  67.06,93.22 90 top
U$157  [VCCIO1]  61.98,93.22 90 bottom
U$158  [VCCIO1]  61.98,93.22 90 top
U$159  [VIN5]  67.06,93.34 90 bottom
U$160  [GND6]  64.52,93.34 90 bottom
U$161  [SCLK3]  82.8,93.22 90 top
U$162  [MISO4]  85.34,93.22 90 top
U$163  [MOSI5]  87.88,93.22 90 top
U$164  [INT8]  90.42,93.22 90 top
U$165  [GND0]  98.04,93.34 90 top
U$166  [SCLK3]  82.8,93.22 90 bottom
U$167  [MISO4]  85.34,93.22 90 bottom
U$168  [#CS9]  80.26,93.09 90 top
U$169  [A111_PULSED_RADAR9]  78.11,119.76 0 top
U$170  [A111_PULSED_RADAR9]  102.74,119.76 0 bottom
U$171  [PI_DISPLAY9]  104.65,109.86 90 top
U$172  [#CS9]  80.26,93.09 90 bottom
U$173  [EN9]  92.96,93.22 90 bottom
U$174  [EN9]  92.96,93.22 90 top
U$175  [BYP]  101.73,94.87 0 top
U$176  [VIN0]  100.58,93.22 90 top
U$177  [VCCIO1]  95.5,93.22 90 bottom
U$178  [VCCIO1]  95.5,93.22 90 top
U$179  [VIN5]  100.58,93.34 90 bottom
U$180  [GND6]  98.04,93.34 90 bottom
U$181  [SCLK3]  15.75,133.1 90 top
U$182  [MISO4]  18.29,133.1 90 top
U$183  [MOSI5]  20.83,133.1 90 top
U$184  [INT8]  23.37,133.1 90 top
U$185  [GND0]  30.99,133.22 90 top
U$186  [SCLK3]  15.75,133.1 90 bottom
U$187  [MISO4]  18.29,133.1 90 bottom
U$188  [#CS9]  13.21,132.97 90 top
U$189  [A111_PULSED_RADAR9]  11.05,159.64 0 top
U$190  [A111_PULSED_RADAR9]  35.69,159.64 0 bottom
U$191  [PI_DISPLAY9]  37.59,149.73 90 top
U$192  [#CS9]  13.21,132.97 90 bottom
U$193  [EN9]  25.91,133.1 90 bottom
U$194  [EN9]  25.91,133.1 90 top
U$195  [BYP]  34.67,134.75 0 top
U$196  [VIN0]  33.53,133.1 90 top
U$197  [VCCIO1]  28.45,133.1 90 bottom
U$198  [VCCIO1]  28.45,133.1 90 top
U$199  [VIN5]  33.53,133.22 90 bottom
U$200  [GND6]  30.99,133.22 90 bottom
U$201  [SCLK3]  49.28,133.1 90 top
U$202  [MISO4]  51.82,133.1 90 top
U$203  [MOSI5]  54.36,133.1 90 top
U$204  [INT8]  56.9,133.1 90 top
U$205  [GND0]  64.52,133.22 90 top
U$206  [SCLK3]  49.28,133.1 90 bottom
U$207  [MISO4]  51.82,133.1 90 bottom
U$208  [#CS9]  46.74,132.97 90 top
U$209  [A111_PULSED_RADAR9]  44.58,159.64 0 top
U$210  [A111_PULSED_RADAR9]  69.22,159.64 0 bottom
U$211  [PI_DISPLAY9]  71.12,149.73 90 top
U$212  [#CS9]  46.74,132.97 90 bottom
U$213  [EN9]  59.44,133.1 90 bottom
U$214  [EN9]  59.44,133.1 90 top
U$215  [BYP]  68.2,134.75 0 top
U$216  [VIN0]  67.06,133.1 90 top
U$217  [VCCIO1]  61.98,133.1 90 bottom
U$218  [VCCIO1]  61.98,133.1 90 top
U$219  [VIN5]  67.06,133.22 90 bottom
U$220  [GND6]  64.52,133.22 90 bottom
U$221  [SCLK3]  82.8,133.1 90 top
U$222  [MISO4]  85.34,133.1 90 top
U$223  [MOSI5]  87.88,133.1 90 top
U$224  [INT8]  90.42,133.1 90 top
U$225  [GND0]  98.04,133.22 90 top
U$226  [SCLK3]  82.8,133.1 90 bottom
U$227  [MISO4]  85.34,133.1 90 bottom
U$228  [#CS9]  80.26,132.97 90 top
U$229  [A111_PULSED_RADAR9]  78.11,159.64 0 top
U$230  [A111_PULSED_RADAR9]  102.74,159.64 0 bottom
U$231  [PI_DISPLAY9]  104.65,149.73 90 top
U$232  [#CS9]  80.26,132.97 90 bottom
U$233  [EN9]  92.96,133.1 90 bottom
U$234  [EN9]  92.96,133.1 90 top
U$235  [BYP]  101.73,134.75 0 top
U$236  [VIN0]  100.58,133.1 90 top
U$237  [VCCIO1]  95.5,133.1 90 bottom
U$238  [VCCIO1]  95.5,133.1 90 top
U$239  [VIN5]  100.58,133.22 90 bottom
U$240  [GND6]  98.04,133.22 90 bottom
Y1  26MHz  [CRYSTAL-SMD-3.2X2.5MM]  28.45,32.26 90 bottom
Y2  26MHz  [CRYSTAL-SMD-3.2X2.5MM]  61.98,32.26 90 bottom
Y3  26MHz  [CRYSTAL-SMD-3.2X2.5MM]  95.5,32.26 90 bottom
Y4  26MHz  [CRYSTAL-SMD-3.2X2.5MM]  28.45,72.14 90 bottom
Y5  26MHz  [CRYSTAL-SMD-3.2X2.5MM]  61.98,72.14 90 bottom
Y6  26MHz  [CRYSTAL-SMD-3.2X2.5MM]  95.5,72.14 90 bottom
Y7  26MHz  [CRYSTAL-SMD-3.2X2.5MM]  28.45,112.01 90 bottom
Y8  26MHz  [CRYSTAL-SMD-3.2X2.5MM]  61.98,112.01 90 bottom
Y9  26MHz  [CRYSTAL-SMD-3.2X2.5MM]  95.5,112.01 90 bottom
Y10  26MHz  [CRYSTAL-SMD-3.2X2.5MM]  28.45,151.89 90 bottom
Y11  26MHz  [CRYSTAL-SMD-3.2X2.5MM]  61.98,151.89 90 bottom
Y12  26MHz  [CRYSTAL-SMD-3.2X2.5MM]  95.5,151.89 90 bottom

## Library data of the parts
BYP BYP1-BYP11 = SparkFun-Jumpers
C1 C5 C7 C11 C15 C17 C21 C25 C27 C31 C35 C37 C41 C45 C47 C51 C55 C57 C61 C65 C67 C71 C75 C77 C81 C85 C87 C91 C95 C97 C101 C105 C107 C111 C115 C117 = SparkFun-Capacitors; PROD_ID: CAP-00810
C2 C6 C8-C10 C12 C16 C18-C20 C22 C26 C28-C30 C32 C36 C38-C40 C42 C46 C48-C50 C52 C56 C58-C60 C62 C66 C68-C70 C72 C76 C78-C80 C82 C86 C88-C90 C92 C96 C98-C100 C102 C106 C108-C110 C112 C116 C118-C120 = SparkFun-Capacitors; PROD_ID: CAP-00868
C3 C4 C13 C14 C23 C24 C33 C34 C43 C44 C53 C54 C63 C64 C73 C74 C83 C84 C93 C94 C103 C104 C113 C114 = SparkFun-Capacitors; PROD_ID: CAP-11812
E$1-E$4 FD1-FD48 LOGO1-LOGO36 = SparkFun-Aesthetics
E$5 E$6 = SparkFun-Retired
H1-H24 = SparkFun-Hardware
J1-J24 = SparkFun-Connectors
R1-R12 = SparkFun-Resistors; PROD_ID: RES-07828
U1 U3 U7 U10 U13 U16 U19 U22 U25 U28 U31 U34 = SparkFun-Sensors; PROD_ID: IC-14498
U2 U5 U8 U11 U14 U17 U20 U23 U26 U29 U32 U35 = SparkFun-IC-Power; PROD_ID: VREG-14239
U4 U6 U9 U12 U15 U18 U21 U24 U27 U30 U33 U36 = SparkFun-IC-Comms; PROD_ID: IC-12292
U$1-U$7 U$9-U$15 U$17 U$18 U$23-U$34 U$41-U$54 U$61-U$74 U$81-U$94 U$101-U$114 U$121-U$134 U$141-U$154 U$161-U$174 U$181-U$194 U$201-U$214 U$221-U$234 = buzzard_labels
U$8 U$35 U$55 U$75 U$95 U$115 U$135 U$155 U$175 U$195 U$215 U$235 = SparkFun-Buzzard
U$16 U$19-U$22 U$36-U$40 U$56-U$60 U$76-U$80 U$96-U$100 U$116-U$120 U$136-U$140 U$156-U$160 U$176-U$180 U$196-U$200 U$216-U$220 U$236-U$240 = buzzard_labels-x02
Y1-Y12 = SparkFun-Clocks; PROD_ID: XTAL-12454

## Nets
1.8V: C1.1 C2.1 C5.1 C6.1 C7.1 C8.1 C10.1 U1.C2 U1.C9 U1.D1 U1.D10 U1.J1 U1.J9 U1.K9 U2.5 U4.5 U4.6
1.8V1: C11.1 C12.1 C15.1 C16.1 C17.1 C18.1 C20.1 U3.C2 U3.C9 U3.D1 U3.D10 U3.J1 U3.J9 U3.K9 U5.5 U6.5 U6.6
1.8V2: C21.1 C22.1 C25.1 C26.1 C27.1 C28.1 C30.1 U7.C2 U7.C9 U7.D1 U7.D10 U7.J1 U7.J9 U7.K9 U8.5 U9.5 U9.6
1.8V3: C31.1 C32.1 C35.1 C36.1 C37.1 C38.1 C40.1 U10.C2 U10.C9 U10.D1 U10.D10 U10.J1 U10.J9 U10.K9 U11.5 U12.5 U12.6
1.8V4: C41.1 C42.1 C45.1 C46.1 C47.1 C48.1 C50.1 U13.C2 U13.C9 U13.D1 U13.D10 U13.J1 U13.J9 U13.K9 U14.5 U15.5 U15.6
1.8V5: C51.1 C52.1 C55.1 C56.1 C57.1 C58.1 C60.1 U16.C2 U16.C9 U16.D1 U16.D10 U16.J1 U16.J9 U16.K9 U17.5 U18.5 U18.6
1.8V6: C61.1 C62.1 C65.1 C66.1 C67.1 C68.1 C70.1 U19.C2 U19.C9 U19.D1 U19.D10 U19.J1 U19.J9 U19.K9 U20.5 U21.5 U21.6
1.8V7: C71.1 C72.1 C75.1 C76.1 C77.1 C78.1 C80.1 U22.C2 U22.C9 U22.D1 U22.D10 U22.J1 U22.J9 U22.K9 U23.5 U24.5 U24.6
1.8V8: C81.1 C82.1 C85.1 C86.1 C87.1 C88.1 C90.1 U25.C2 U25.C9 U25.D1 U25.D10 U25.J1 U25.J9 U25.K9 U26.5 U27.5 U27.6
1.8V9: C91.1 C92.1 C95.1 C96.1 C97.1 C98.1 C100.1 U28.C2 U28.C9 U28.D1 U28.D10 U28.J1 U28.J9 U28.K9 U29.5 U30.5 U30.6
1.8V10: C101.1 C102.1 C105.1 C106.1 C107.1 C108.1 C110.1 U31.C2 U31.C9 U31.D1 U31.D10 U31.J1 U31.J9 U31.K9 U32.5 U33.5 U33.6
1.8V11: C111.1 C112.1 C115.1 C116.1 C117.1 C118.1 C120.1 U34.C2 U34.C9 U34.D1 U34.D10 U34.J1 U34.J9 U34.K9 U35.5 U36.5 U36.6
!CS!: U1.J2 U4.1
!CS!1: U3.J2 U6.1
!CS!2: U7.J2 U9.1
!CS!3: U10.J2 U12.1
!CS!4: U13.J2 U15.1
!CS!5: U16.J2 U18.1
!CS!6: U19.J2 U21.1
!CS!7: U22.J2 U24.1
!CS!8: U25.J2 U27.1
!CS!9: U28.J2 U30.1
!CS!10: U31.J2 U33.1
!CS!11: U34.J2 U36.1
!CS!_RPI: J1.1 J4.24 U4.20
!CS!_RPI1: J2.24 J3.1 U6.20
!CS!_RPI2: J5.24 J6.1 U9.20
!CS!_RPI3: J7.24 J8.1 U12.20
!CS!_RPI4: J9.24 J10.1 U15.20
!CS!_RPI5: J11.24 J12.1 U18.20
!CS!_RPI6: J13.24 J14.1 U21.20
!CS!_RPI7: J15.24 J16.1 U24.20
!CS!_RPI8: J17.24 J18.1 U27.20
!CS!_RPI9: J19.24 J20.1 U30.20
!CS!_RPI10: J21.24 J22.1 U33.20
!CS!_RPI11: J23.24 J24.1 U36.20
ENABLE: U1.F10 U4.10
ENABLE1: U3.F10 U6.10
ENABLE2: U7.F10 U9.10
ENABLE3: U10.F10 U12.10
ENABLE4: U13.F10 U15.10
ENABLE5: U16.F10 U18.10
ENABLE6: U19.F10 U21.10
ENABLE7: U22.F10 U24.10
ENABLE8: U25.F10 U27.10
ENABLE9: U28.F10 U30.10
ENABLE10: U31.F10 U33.10
ENABLE11: U34.F10 U36.10
ENABLE_RPI: J1.6 J4.13 U4.11
ENABLE_RPI1: J2.13 J3.6 U6.11
ENABLE_RPI2: J5.13 J6.6 U9.11
ENABLE_RPI3: J7.13 J8.6 U12.11
ENABLE_RPI4: J9.13 J10.6 U15.11
ENABLE_RPI5: J11.13 J12.6 U18.11
ENABLE_RPI6: J13.13 J14.6 U21.11
ENABLE_RPI7: J15.13 J16.6 U24.11
ENABLE_RPI8: J17.13 J18.6 U27.11
ENABLE_RPI9: J19.13 J20.6 U30.11
ENABLE_RPI10: J21.13 J22.6 U33.11
ENABLE_RPI11: J23.13 J24.6 U36.11
GND: C1.2 C2.2 C3.2 C4.1 C5.2 C6.2 C7.2 C8.2 C9.2 C10.2 J1.8 J4.6 J4.9 J4.14 J4.20 J4.25 R1.1 U1.A3 U1.A4 U1.A5 U1.A6 U1.A7 U1.A8 U1.A9 U1.B2 U1.B9 U1.B10 U1.C1 U1.C10 U1.D2 U1.D9 U1.E1 U1.E2 U1.E9 U1.E10 U1.F1 U1.F2 U1.F9 U1.G1 U1.G10 U1.H1 U1.H2 U1.H9 U1.J3 U1.J5 U1.J6 U1.J8 U1.K4 U1.K5 U1.K7 U2.2 U4.15 Y1.2 Y1.4
GND1: C11.2 C12.2 C13.2 C14.1 C15.2 C16.2 C17.2 C18.2 C19.2 C20.2 J2.6 J2.9 J2.14 J2.20 J2.25 J3.8 R2.1 U3.A3 U3.A4 U3.A5 U3.A6 U3.A7 U3.A8 U3.A9 U3.B2 U3.B9 U3.B10 U3.C1 U3.C10 U3.D2 U3.D9 U3.E1 U3.E2 U3.E9 U3.E10 U3.F1 U3.F2 U3.F9 U3.G1 U3.G10 U3.H1 U3.H2 U3.H9 U3.J3 U3.J5 U3.J6 U3.J8 U3.K4 U3.K5 U3.K7 U5.2 U6.15 Y2.2 Y2.4
GND2: C21.2 C22.2 C23.2 C24.1 C25.2 C26.2 C27.2 C28.2 C29.2 C30.2 J5.6 J5.9 J5.14 J5.20 J5.25 J6.8 R3.1 U7.A3 U7.A4 U7.A5 U7.A6 U7.A7 U7.A8 U7.A9 U7.B2 U7.B9 U7.B10 U7.C1 U7.C10 U7.D2 U7.D9 U7.E1 U7.E2 U7.E9 U7.E10 U7.F1 U7.F2 U7.F9 U7.G1 U7.G10 U7.H1 U7.H2 U7.H9 U7.J3 U7.J5 U7.J6 U7.J8 U7.K4 U7.K5 U7.K7 U8.2 U9.15 Y3.2 Y3.4
GND3: C31.2 C32.2 C33.2 C34.1 C35.2 C36.2 C37.2 C38.2 C39.2 C40.2 J7.6 J7.9 J7.14 J7.20 J7.25 J8.8 R4.1 U10.A3 U10.A4 U10.A5 U10.A6 U10.A7 U10.A8 U10.A9 U10.B2 U10.B9 U10.B10 U10.C1 U10.C10 U10.D2 U10.D9 U10.E1 U10.E2 U10.E9 U10.E10 U10.F1 U10.F2 U10.F9 U10.G1 U10.G10 U10.H1 U10.H2 U10.H9 U10.J3 U10.J5 U10.J6 U10.J8 U10.K4 U10.K5 U10.K7 U11.2 U12.15 Y4.2 Y4.4
GND4: C41.2 C42.2 C43.2 C44.1 C45.2 C46.2 C47.2 C48.2 C49.2 C50.2 J9.6 J9.9 J9.14 J9.20 J9.25 J10.8 R5.1 U13.A3 U13.A4 U13.A5 U13.A6 U13.A7 U13.A8 U13.A9 U13.B2 U13.B9 U13.B10 U13.C1 U13.C10 U13.D2 U13.D9 U13.E1 U13.E2 U13.E9 U13.E10 U13.F1 U13.F2 U13.F9 U13.G1 U13.G10 U13.H1 U13.H2 U13.H9 U13.J3 U13.J5 U13.J6 U13.J8 U13.K4 U13.K5 U13.K7 U14.2 U15.15 Y5.2 Y5.4
GND5: C51.2 C52.2 C53.2 C54.1 C55.2 C56.2 C57.2 C58.2 C59.2 C60.2 J11.6 J11.9 J11.14 J11.20 J11.25 J12.8 R6.1 U16.A3 U16.A4 U16.A5 U16.A6 U16.A7 U16.A8 U16.A9 U16.B2 U16.B9 U16.B10 U16.C1 U16.C10 U16.D2 U16.D9 U16.E1 U16.E2 U16.E9 U16.E10 U16.F1 U16.F2 U16.F9 U16.G1 U16.G10 U16.H1 U16.H2 U16.H9 U16.J3 U16.J5 U16.J6 U16.J8 U16.K4 U16.K5 U16.K7 U17.2 U18.15 Y6.2 Y6.4
GND6: C61.2 C62.2 C63.2 C64.1 C65.2 C66.2 C67.2 C68.2 C69.2 C70.2 J13.6 J13.9 J13.14 J13.20 J13.25 J14.8 R7.1 U19.A3 U19.A4 U19.A5 U19.A6 U19.A7 U19.A8 U19.A9 U19.B2 U19.B9 U19.B10 U19.C1 U19.C10 U19.D2 U19.D9 U19.E1 U19.E2 U19.E9 U19.E10 U19.F1 U19.F2 U19.F9 U19.G1 U19.G10 U19.H1 U19.H2 U19.H9 U19.J3 U19.J5 U19.J6 U19.J8 U19.K4 U19.K5 U19.K7 U20.2 U21.15 Y7.2 Y7.4
GND7: C71.2 C72.2 C73.2 C74.1 C75.2 C76.2 C77.2 C78.2 C79.2 C80.2 J15.6 J15.9 J15.14 J15.20 J15.25 J16.8 R8.1 U22.A3 U22.A4 U22.A5 U22.A6 U22.A7 U22.A8 U22.A9 U22.B2 U22.B9 U22.B10 U22.C1 U22.C10 U22.D2 U22.D9 U22.E1 U22.E2 U22.E9 U22.E10 U22.F1 U22.F2 U22.F9 U22.G1 U22.G10 U22.H1 U22.H2 U22.H9 U22.J3 U22.J5 U22.J6 U22.J8 U22.K4 U22.K5 U22.K7 U23.2 U24.15 Y8.2 Y8.4
GND8: C81.2 C82.2 C83.2 C84.1 C85.2 C86.2 C87.2 C88.2 C89.2 C90.2 J17.6 J17.9 J17.14 J17.20 J17.25 J18.8 R9.1 U25.A3 U25.A4 U25.A5 U25.A6 U25.A7 U25.A8 U25.A9 U25.B2 U25.B9 U25.B10 U25.C1 U25.C10 U25.D2 U25.D9 U25.E1 U25.E2 U25.E9 U25.E10 U25.F1 U25.F2 U25.F9 U25.G1 U25.G10 U25.H1 U25.H2 U25.H9 U25.J3 U25.J5 U25.J6 U25.J8 U25.K4 U25.K5 U25.K7 U26.2 U27.15 Y9.2 Y9.4
GND9: C91.2 C92.2 C93.2 C94.1 C95.2 C96.2 C97.2 C98.2 C99.2 C100.2 J19.6 J19.9 J19.14 J19.20 J19.25 J20.8 R10.1 U28.A3 U28.A4 U28.A5 U28.A6 U28.A7 U28.A8 U28.A9 U28.B2 U28.B9 U28.B10 U28.C1 U28.C10 U28.D2 U28.D9 U28.E1 U28.E2 U28.E9 U28.E10 U28.F1 U28.F2 U28.F9 U28.G1 U28.G10 U28.H1 U28.H2 U28.H9 U28.J3 U28.J5 U28.J6 U28.J8 U28.K4 U28.K5 U28.K7 U29.2 U30.15 Y10.2 Y10.4
GND10: C101.2 C102.2 C103.2 C104.1 C105.2 C106.2 C107.2 C108.2 C109.2 C110.2 J21.6 J21.9 J21.14 J21.20 J21.25 J22.8 R11.1 U31.A3 U31.A4 U31.A5 U31.A6 U31.A7 U31.A8 U31.A9 U31.B2 U31.B9 U31.B10 U31.C1 U31.C10 U31.D2 U31.D9 U31.E1 U31.E2 U31.E9 U31.E10 U31.F1 U31.F2 U31.F9 U31.G1 U31.G10 U31.H1 U31.H2 U31.H9 U31.J3 U31.J5 U31.J6 U31.J8 U31.K4 U31.K5 U31.K7 U32.2 U33.15 Y11.2 Y11.4
GND11: C111.2 C112.2 C113.2 C114.1 C115.2 C116.2 C117.2 C118.2 C119.2 C120.2 J23.6 J23.9 J23.14 J23.20 J23.25 J24.8 R12.1 U34.A3 U34.A4 U34.A5 U34.A6 U34.A7 U34.A8 U34.A9 U34.B2 U34.B9 U34.B10 U34.C1 U34.C10 U34.D2 U34.D9 U34.E1 U34.E2 U34.E9 U34.E10 U34.F1 U34.F2 U34.F9 U34.G1 U34.G10 U34.H1 U34.H2 U34.H9 U34.J3 U34.J5 U34.J6 U34.J8 U34.K4 U34.K5 U34.K7 U35.2 U36.15 Y12.2 Y12.4
INTERRUPT: R1.2 U1.K8 U4.9
INTERRUPT1: R2.2 U3.K8 U6.9
INTERRUPT2: R3.2 U7.K8 U9.9
INTERRUPT3: R4.2 U10.K8 U12.9
INTERRUPT4: R5.2 U13.K8 U15.9
INTERRUPT5: R6.2 U16.K8 U18.9
INTERRUPT6: R7.2 U19.K8 U21.9
INTERRUPT7: R8.2 U22.K8 U24.9
INTERRUPT8: R9.2 U25.K8 U27.9
INTERRUPT9: R10.2 U28.K8 U30.9
INTERRUPT10: R11.2 U31.K8 U33.9
INTERRUPT11: R12.2 U34.K8 U36.9
INTERRUPT_RPI: J1.5 J4.22 U4.12
INTERRUPT_RPI1: J2.22 J3.5 U6.12
INTERRUPT_RPI2: J5.22 J6.5 U9.12
INTERRUPT_RPI3: J7.22 J8.5 U12.12
INTERRUPT_RPI4: J9.22 J10.5 U15.12
INTERRUPT_RPI5: J11.22 J12.5 U18.12
INTERRUPT_RPI6: J13.22 J14.5 U21.12
INTERRUPT_RPI7: J15.22 J16.5 U24.12
INTERRUPT_RPI8: J17.22 J18.5 U27.12
INTERRUPT_RPI9: J19.22 J20.5 U30.12
INTERRUPT_RPI10: J21.22 J22.5 U33.12
INTERRUPT_RPI11: J23.22 J24.5 U36.12
MISO: U1.K3 U4.3
MISO1: U3.K3 U6.3
MISO2: U7.K3 U9.3
MISO3: U10.K3 U12.3
MISO4: U13.K3 U15.3
MISO5: U16.K3 U18.3
MISO6: U19.K3 U21.3
MISO7: U22.K3 U24.3
MISO8: U25.K3 U27.3
MISO9: U28.K3 U30.3
MISO10: U31.K3 U33.3
MISO11: U34.K3 U36.3
MISO_RPI: J1.3 J4.21 U4.18
MISO_RPI1: J2.21 J3.3 U6.18
MISO_RPI2: J5.21 J6.3 U9.18
MISO_RPI3: J7.21 J8.3 U12.18
MISO_RPI4: J9.21 J10.3 U15.18
MISO_RPI5: J11.21 J12.3 U18.18
MISO_RPI6: J13.21 J14.3 U21.18
MISO_RPI7: J15.21 J16.3 U24.18
MISO_RPI8: J17.21 J18.3 U27.18
MISO_RPI9: J19.21 J20.3 U30.18
MISO_RPI10: J21.21 J22.3 U33.18
MISO_RPI11: J23.21 J24.3 U36.18
MOSI: U1.K6 U4.8
MOSI1: U3.K6 U6.8
MOSI2: U7.K6 U9.8
MOSI3: U10.K6 U12.8
MOSI4: U13.K6 U15.8
MOSI5: U16.K6 U18.8
MOSI6: U19.K6 U21.8
MOSI7: U22.K6 U24.8
MOSI8: U25.K6 U27.8
MOSI9: U28.K6 U30.8
MOSI10: U31.K6 U33.8
MOSI11: U34.K6 U36.8
MOSI_RPI: J1.4 J4.19 U4.13
MOSI_RPI1: J2.19 J3.4 U6.13
MOSI_RPI2: J5.19 J6.4 U9.13
MOSI_RPI3: J7.19 J8.4 U12.13
MOSI_RPI4: J9.19 J10.4 U15.13
MOSI_RPI5: J11.19 J12.4 U18.13
MOSI_RPI6: J13.19 J14.4 U21.13
MOSI_RPI7: J15.19 J16.4 U24.13
MOSI_RPI8: J17.19 J18.4 U27.13
MOSI_RPI9: J19.19 J20.4 U30.13
MOSI_RPI10: J21.19 J22.4 U33.13
MOSI_RPI11: J23.19 J24.4 U36.13
N$1: C3.1 U1.J10 Y1.1
N$2: C4.2 U1.H10 Y1.3
N$3: C13.1 U3.J10 Y2.1
N$4: C14.2 U3.H10 Y2.3
N$5: C23.1 U7.J10 Y3.1
N$6: C24.2 U7.H10 Y3.3
N$7: C33.1 U10.J10 Y4.1
N$8: C34.2 U10.H10 Y4.3
N$9: C43.1 U13.J10 Y5.1
N$10: C44.2 U13.H10 Y5.3
N$11: C53.1 U16.J10 Y6.1
N$12: C54.2 U16.H10 Y6.3
N$13: C63.1 U19.J10 Y7.1
N$14: C64.2 U19.H10 Y7.3
N$15: C73.1 U22.J10 Y8.1
N$16: C74.2 U22.H10 Y8.3
N$17: C83.1 U25.J10 Y9.1
N$18: C84.2 U25.H10 Y9.3
N$19: C93.1 U28.J10 Y10.1
N$20: C94.2 U28.H10 Y10.3
N$21: C103.1 U31.J10 Y11.1
N$22: C104.2 U31.H10 Y11.3
N$23: C113.1 U34.J10 Y12.1
N$24: C114.2 U34.H10 Y12.3
SCLK: U1.K2 U4.2
SCLK1: U3.K2 U6.2
SCLK2: U7.K2 U9.2
SCLK3: U10.K2 U12.2
SCLK4: U13.K2 U15.2
SCLK5: U16.K2 U18.2
SCLK6: U19.K2 U21.2
SCLK7: U22.K2 U24.2
SCLK8: U25.K2 U27.2
SCLK9: U28.K2 U30.2
SCLK10: U31.K2 U33.2
SCLK11: U34.K2 U36.2
SCLK_RPI: J1.2 J4.23 U4.19
SCLK_RPI1: J2.23 J3.2 U6.19
SCLK_RPI2: J5.23 J6.2 U9.19
SCLK_RPI3: J7.23 J8.2 U12.19
SCLK_RPI4: J9.23 J10.2 U15.19
SCLK_RPI5: J11.23 J12.2 U18.19
SCLK_RPI6: J13.23 J14.2 U21.19
SCLK_RPI7: J15.23 J16.2 U24.19
SCLK_RPI8: J17.23 J18.2 U27.19
SCLK_RPI9: J19.23 J20.2 U30.19
SCLK_RPI10: J21.23 J22.2 U33.19
SCLK_RPI11: J23.23 J24.2 U36.19
VCCIO: BYP.1 J1.7 J4.1 J4.17 U4.16
VCCIO1: BYP1.1 J2.1 J2.17 J3.7 U6.16
VCCIO2: BYP2.1 J5.1 J5.17 J6.7 U9.16
VCCIO3: BYP3.1 J7.1 J7.17 J8.7 U12.16
VCCIO4: BYP4.1 J9.1 J9.17 J10.7 U15.16
VCCIO5: BYP5.1 J11.1 J11.17 J12.7 U18.16
VCCIO6: BYP6.1 J13.1 J13.17 J14.7 U21.16
VCCIO7: BYP7.1 J15.1 J15.17 J16.7 U24.16
VCCIO8: BYP8.1 J17.1 J17.17 J18.7 U27.16
VCCIO9: BYP9.1 J19.1 J19.17 J20.7 U30.16
VCCIO10: BYP10.1 J21.1 J21.17 J22.7 U33.16
VCCIO11: BYP11.1 J23.1 J23.17 J24.7 U36.16
VIN: BYP.2 C9.1 J1.9 J4.2 J4.4 U2.1 U2.3
VIN1: BYP1.2 C19.1 J2.2 J2.4 J3.9 U5.1 U5.3
VIN2: BYP2.2 C29.1 J5.2 J5.4 J6.9 U8.1 U8.3
VIN3: BYP3.2 C39.1 J7.2 J7.4 J8.9 U11.1 U11.3
VIN4: BYP4.2 C49.1 J9.2 J9.4 J10.9 U14.1 U14.3
VIN5: BYP5.2 C59.1 J11.2 J11.4 J12.9 U17.1 U17.3
VIN6: BYP6.2 C69.1 J13.2 J13.4 J14.9 U20.1 U20.3
VIN7: BYP7.2 C79.1 J15.2 J15.4 J16.9 U23.1 U23.3
VIN8: BYP8.2 C89.1 J17.2 J17.4 J18.9 U26.1 U26.3
VIN9: BYP9.2 C99.1 J19.2 J19.4 J20.9 U29.1 U29.3
VIN10: BYP10.2 C109.1 J21.2 J21.4 J22.9 U32.1 U32.3
VIN11: BYP11.2 C119.1 J23.2 J23.4 J24.9 U35.1 U35.3

## Tracks (layer width: path | path; a pad name or v marks a point on that pad's centre or on a via)
1.8V  (via drill 0.3)
  Top 0.152: v24.46,34.78 v24.46,34.77
  Top 0.254: U1.C9 v24.46,34.78 | U1.C2 v22.28,34.78 | U1.D1 v20.22,34.28 | U1.J1 v20.22,31.78 | U1.J9 U1.K9 v25.12,30.18 | v23.17,20.32 v26.16,20.32 | v26.54,35.05 26.54,34.42 26.4,34.28 U1.D10
  Bottom 0.152: U4.6 23.57,19.92 v23.17,20.32
  Bottom 0.203: U4.5 v23.17,20.32
  Bottom 0.254: C1.1 19.14,34.29 | 19.14,34.29 C2.1 | 19.14,34.29 19.15,34.28 v20.22,34.28 20.72,34.78 v22.28,34.78 | C7.1 26.76,29.76 26.34,30.18 v25.12,30.18 25.12,30.23 23.57,31.78 v20.22,31.78 | C6.1 C5.1 27.56,36.07 v26.54,35.05 26.26,34.77 v24.46,34.77
  Bottom 0.406: C8.1 26.76,28.32 | 26.76,28.32 C7.1 | 27.6,38.61 30.99,38.61 32.82,36.78 32.82,28.63 32.51,28.32 31.62,28.32 | 27.6,38.61 20.83,38.61 19.14,36.92 C2.1 | C6.1 27.6,38.61 | U2.5 31.72,19.24 C10.1 31.62,20.32 | v26.16,20.32 31.62,20.32 | 31.62,20.32 31.62,28.32 | 26.76,28.32 31.62,28.32
1.8V1  (via drill 0.3)
  Top 0.152: v57.99,34.78 v57.99,34.77
  Top 0.254: U3.C9 v57.99,34.78 | U3.C2 v55.8,34.78 | U3.D1 v53.75,34.28 | U3.J1 v53.75,31.78 | U3.J9 U3.K9 v58.65,30.18 | v56.7,20.32 v59.69,20.32 | v60.07,35.05 60.07,34.42 59.93,34.28 U3.D10
  Bottom 0.152: U6.6 57.1,19.92 v56.7,20.32
  Bottom 0.203: U6.5 v56.7,20.32
  Bottom 0.254: C11.1 52.67,34.29 | 52.67,34.29 C12.1 | 52.67,34.29 52.68,34.28 v53.75,34.28 54.25,34.78 v55.8,34.78 | C17.1 60.29,29.76 59.87,30.18 v58.65,30.18 58.65,30.23 57.09,31.78 v53.75,31.78 | C16.1 C15.1 61.09,36.07 v60.07,35.05 59.79,34.77 v57.99,34.77
  Bottom 0.406: C18.1 60.29,28.32 | 60.29,28.32 C17.1 | 61.13,38.61 64.52,38.61 66.34,36.78 66.34,28.63 66.04,28.32 65.15,28.32 | 61.13,38.61 54.36,38.61 52.67,36.92 C12.1 | C16.1 61.13,38.61 | U5.5 65.25,19.24 C20.1 65.15,20.32 | v59.69,20.32 65.15,20.32 | 65.15,20.32 65.15,28.32 | 60.29,28.32 65.15,28.32
1.8V2  (via drill 0.3)
  Top 0.152: v91.52,34.78 v91.52,34.77
  Top 0.254: U7.C9 v91.52,34.78 | U7.C2 v89.33,34.78 | U7.D1 v87.27,34.28 | U7.J1 v87.27,31.78 | U7.J9 U7.K9 v92.17,30.18 | v90.22,20.32 v93.22,20.32 | v93.6,35.05 93.6,34.42 93.46,34.28 U7.D10
  Bottom 0.152: U9.6 90.62,19.92 v90.22,20.32
  Bottom 0.203: U9.5 v90.22,20.32
  Bottom 0.254: C21.1 86.19,34.29 | 86.19,34.29 C22.1 | 86.19,34.29 86.21,34.28 v87.27,34.28 87.77,34.78 v89.33,34.78 | C27.1 93.81,29.76 93.4,30.18 v92.17,30.18 92.17,30.23 90.62,31.78 v87.27,31.78 | C26.1 C25.1 94.62,36.07 v93.6,35.05 93.32,34.77 v91.52,34.77
  Bottom 0.406: C28.1 93.81,28.32 | 93.81,28.32 C27.1 | 94.65,38.61 98.04,38.61 99.87,36.78 99.87,28.63 99.57,28.32 98.68,28.32 | 94.65,38.61 87.88,38.61 86.19,36.92 C22.1 | C26.1 94.65,38.61 | U8.5 98.78,19.24 C30.1 98.68,20.32 | v93.22,20.32 98.68,20.32 | 98.68,20.32 98.68,28.32 | 93.81,28.32 98.68,28.32
1.8V3  (via drill 0.3)
  Top 0.152: v24.46,74.66 v24.46,74.65
  Top 0.254: U10.C9 v24.46,74.66 | U10.C2 v22.28,74.66 | U10.D1 v20.22,74.16 | U10.J1 v20.22,71.66 | U10.J9 U10.K9 v25.12,70.05 | v23.17,60.2 v26.16,60.2 | v26.54,74.93 26.54,74.3 26.4,74.16 U10.D10
  Bottom 0.152: U12.6 23.57,59.8 v23.17,60.2
  Bottom 0.203: U12.5 v23.17,60.2
  Bottom 0.254: C31.1 19.14,74.17 | 19.14,74.17 C32.1 | 19.14,74.17 19.15,74.16 v20.22,74.16 20.72,74.66 v22.28,74.66 | C37.1 26.76,69.64 26.34,70.05 v25.12,70.05 25.12,70.11 23.57,71.66 v20.22,71.66 | C36.1 C35.1 27.56,75.95 v26.54,74.93 26.26,74.65 v24.46,74.65
  Bottom 0.406: C38.1 26.76,68.2 | 26.76,68.2 C37.1 | 27.6,78.49 30.99,78.49 32.82,76.66 32.82,68.5 32.51,68.2 31.62,68.2 | 27.6,78.49 20.83,78.49 19.14,76.8 C32.1 | C36.1 27.6,78.49 | U11.5 31.72,59.12 C40.1 31.62,60.2 | v26.16,60.2 31.62,60.2 | 31.62,60.2 31.62,68.2 | 26.76,68.2 31.62,68.2
1.8V4  (via drill 0.3)
  Top 0.152: v57.99,74.66 v57.99,74.65
  Top 0.254: U13.C9 v57.99,74.66 | U13.C2 v55.8,74.66 | U13.D1 v53.75,74.16 | U13.J1 v53.75,71.66 | U13.J9 U13.K9 v58.65,70.05 | v56.7,60.2 v59.69,60.2 | v60.07,74.93 60.07,74.3 59.93,74.16 U13.D10
  Bottom 0.152: U15.6 57.1,59.8 v56.7,60.2
  Bottom 0.203: U15.5 v56.7,60.2
  Bottom 0.254: C41.1 52.67,74.17 | 52.67,74.17 C42.1 | 52.67,74.17 52.68,74.16 v53.75,74.16 54.25,74.66 v55.8,74.66 | C47.1 60.29,69.64 59.87,70.05 v58.65,70.05 58.65,70.11 57.09,71.66 v53.75,71.66 | C46.1 C45.1 61.09,75.95 v60.07,74.93 59.79,74.65 v57.99,74.65
  Bottom 0.406: C48.1 60.29,68.2 | 60.29,68.2 C47.1 | 61.13,78.49 64.52,78.49 66.34,76.66 66.34,68.5 66.04,68.2 65.15,68.2 | 61.13,78.49 54.36,78.49 52.67,76.8 C42.1 | C46.1 61.13,78.49 | U14.5 65.25,59.12 C50.1 65.15,60.2 | v59.69,60.2 65.15,60.2 | 65.15,60.2 65.15,68.2 | 60.29,68.2 65.15,68.2
1.8V5  (via drill 0.3)
  Top 0.152: v91.52,74.66 v91.52,74.65
  Top 0.254: U16.C9 v91.52,74.66 | U16.C2 v89.33,74.66 | U16.D1 v87.27,74.16 | U16.J1 v87.27,71.66 | U16.J9 U16.K9 v92.17,70.05 | v90.22,60.2 v93.22,60.2 | v93.6,74.93 93.6,74.3 93.46,74.16 U16.D10
  Bottom 0.152: U18.6 90.62,59.8 v90.22,60.2
  Bottom 0.203: U18.5 v90.22,60.2
  Bottom 0.254: C51.1 86.19,74.17 | 86.19,74.17 C52.1 | 86.19,74.17 86.21,74.16 v87.27,74.16 87.77,74.66 v89.33,74.66 | C57.1 93.81,69.64 93.4,70.05 v92.17,70.05 92.17,70.11 90.62,71.66 v87.27,71.66 | C56.1 C55.1 94.62,75.95 v93.6,74.93 93.32,74.65 v91.52,74.65
  Bottom 0.406: C58.1 93.81,68.2 | 93.81,68.2 C57.1 | 94.65,78.49 98.04,78.49 99.87,76.66 99.87,68.5 99.57,68.2 98.68,68.2 | 94.65,78.49 87.88,78.49 86.19,76.8 C52.1 | C56.1 94.65,78.49 | U17.5 98.78,59.12 C60.1 98.68,60.2 | v93.22,60.2 98.68,60.2 | 98.68,60.2 98.68,68.2 | 93.81,68.2 98.68,68.2
1.8V6  (via drill 0.3)
  Top 0.152: v24.46,114.53
  Top 0.254: U19.C9 v24.46,114.53 | U19.C2 v22.28,114.53 | U19.D1 v20.22,114.03 | U19.J1 v20.22,111.53 | U19.J9 U19.K9 v25.12,109.93 | v23.17,100.08 v26.16,100.08 | v26.54,114.81 26.54,114.17 26.4,114.03 U19.D10
  Bottom 0.152: U21.6 23.57,99.68 v23.17,100.08
  Bottom 0.203: U21.5 v23.17,100.08
  Bottom 0.254: C61.1 19.14,114.05 | 19.14,114.05 C62.1 | 19.14,114.05 19.15,114.03 v20.22,114.03 20.72,114.53 v22.28,114.53 | C67.1 26.76,109.51 26.34,109.93 v25.12,109.93 25.12,109.98 23.57,111.53 v20.22,111.53 | C66.1 C65.1 27.56,115.82 v26.54,114.81 26.26,114.53 v24.46,114.53
  Bottom 0.406: C68.1 26.76,108.08 | 26.76,108.08 C67.1 | 27.6,118.36 30.99,118.36 32.82,116.54 32.82,108.38 32.51,108.08 31.62,108.08 | 27.6,118.36 20.83,118.36 19.14,116.67 C62.1 | C66.1 27.6,118.36 | U20.5 31.72,98.99 C70.1 31.62,100.08 | v26.16,100.08 31.62,100.08 | 31.62,100.08 31.62,108.08 | 26.76,108.08 31.62,108.08
1.8V7  (via drill 0.3)
  Top 0.152: v57.99,114.53
  Top 0.254: U22.C9 v57.99,114.53 | U22.C2 v55.8,114.53 | U22.D1 v53.75,114.03 | U22.J1 v53.75,111.53 | U22.J9 U22.K9 v58.65,109.93 | v56.7,100.08 v59.69,100.08 | v60.07,114.81 60.07,114.17 59.93,114.03 U22.D10
  Bottom 0.152: U24.6 57.1,99.68 v56.7,100.08
  Bottom 0.203: U24.5 v56.7,100.08
  Bottom 0.254: C71.1 52.67,114.05 | 52.67,114.05 C72.1 | 52.67,114.05 52.68,114.03 v53.75,114.03 54.25,114.53 v55.8,114.53 | C77.1 60.29,109.51 59.87,109.93 v58.65,109.93 58.65,109.98 57.09,111.53 v53.75,111.53 | C76.1 C75.1 61.09,115.82 v60.07,114.81 59.79,114.53 v57.99,114.53
  Bottom 0.406: C78.1 60.29,108.08 | 60.29,108.08 C77.1 | 61.13,118.36 64.52,118.36 66.34,116.54 66.34,108.38 66.04,108.08 65.15,108.08 | 61.13,118.36 54.36,118.36 52.67,116.67 C72.1 | C76.1 61.13,118.36 | U23.5 65.25,98.99 C80.1 65.15,100.08 | v59.69,100.08 65.15,100.08 | 65.15,100.08 65.15,108.08 | 60.29,108.08 65.15,108.08
1.8V8  (via drill 0.3)
  Top 0.152: v91.52,114.53
  Top 0.254: U25.C9 v91.52,114.53 | U25.C2 v89.33,114.53 | U25.D1 v87.27,114.03 | U25.J1 v87.27,111.53 | U25.J9 U25.K9 v92.17,109.93 | v90.22,100.08 v93.22,100.08 | v93.6,114.81 93.6,114.17 93.46,114.03 U25.D10
  Bottom 0.152: U27.6 90.62,99.68 v90.22,100.08
  Bottom 0.203: U27.5 v90.22,100.08
  Bottom 0.254: C81.1 86.19,114.05 | 86.19,114.05 C82.1 | 86.19,114.05 86.21,114.03 v87.27,114.03 87.77,114.53 v89.33,114.53 | C87.1 93.81,109.51 93.4,109.93 v92.17,109.93 92.17,109.98 90.62,111.53 v87.27,111.53 | C86.1 C85.1 94.62,115.82 v93.6,114.81 93.32,114.53 v91.52,114.53
  Bottom 0.406: C88.1 93.81,108.08 | 93.81,108.08 C87.1 | 94.65,118.36 98.04,118.36 99.87,116.54 99.87,108.38 99.57,108.08 98.68,108.08 | 94.65,118.36 87.88,118.36 86.19,116.67 C82.1 | C86.1 94.65,118.36 | U26.5 98.78,98.99 C90.1 98.68,100.08 | v93.22,100.08 98.68,100.08 | 98.68,100.08 98.68,108.08 | 93.81,108.08 98.68,108.08
1.8V9  (via drill 0.3)
  Top 0.152: v24.46,154.41